# Altium PCB Keyboard_Mouse_PCB.PcbDoc
Units mil, origin at the board's own origin, x right, y up, seen from the top; angles counter-clockwise.
Board outline 5600 x 4000 mil, 4 copper layers (Top Layer, Plan(Gnd), Plane(Pwr), Bottom Layer), stack 23.756 mil thick; 132 components, 121 nets, 338 pads, 427 vias.
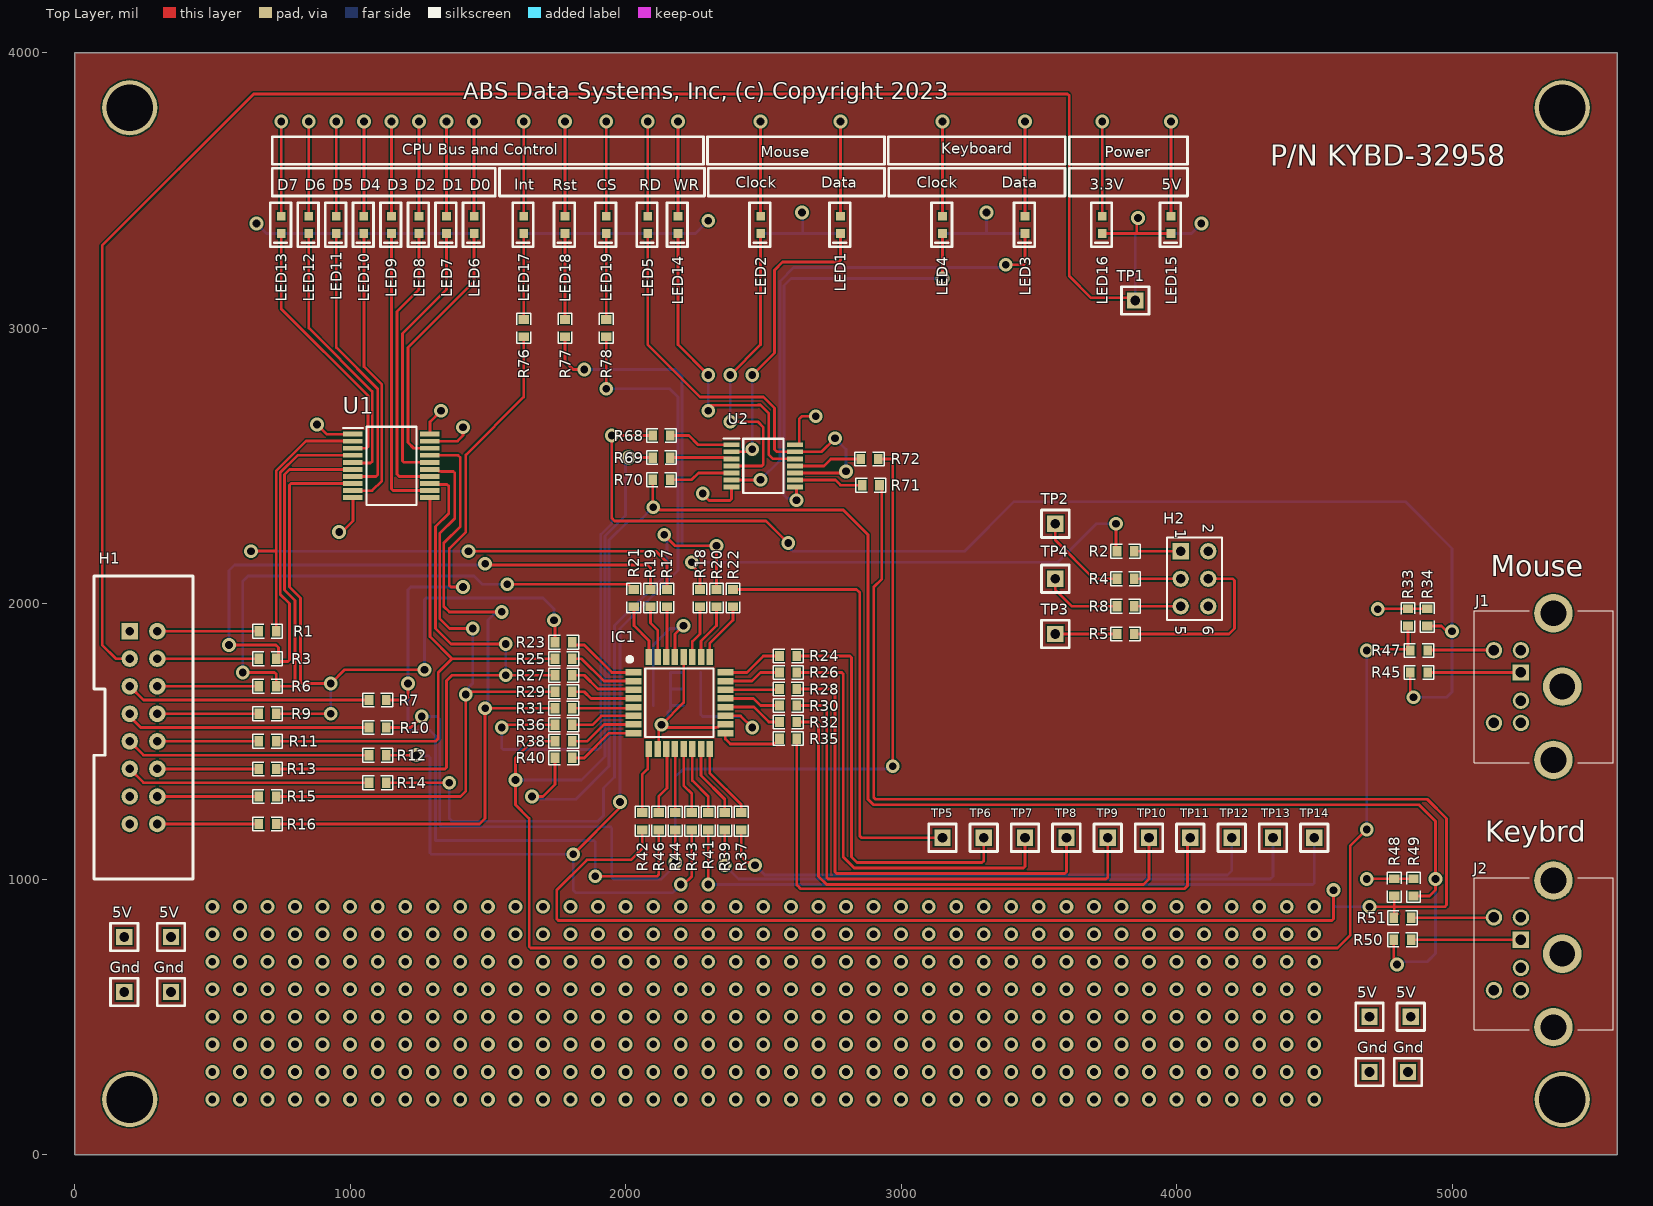
[diagram p0: Top Layer view]
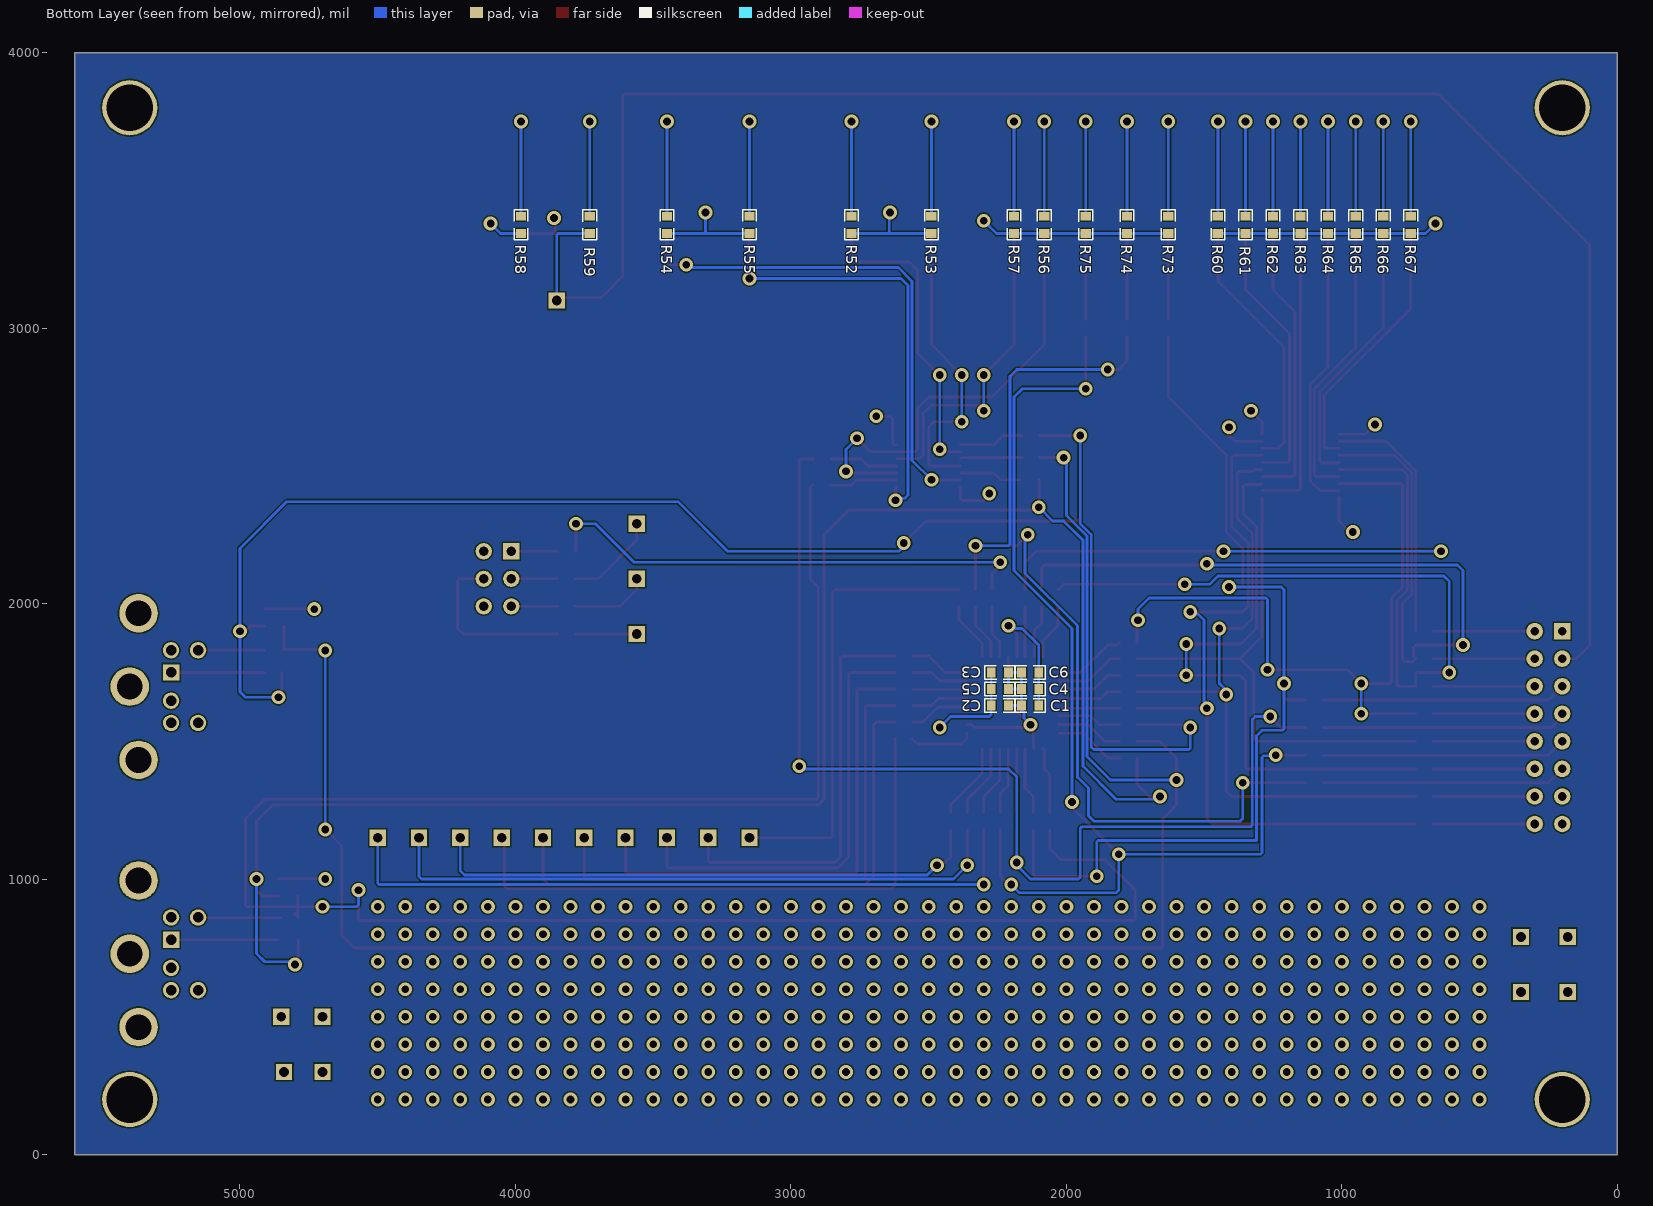
[diagram p1: Bottom Layer view, seen from below]
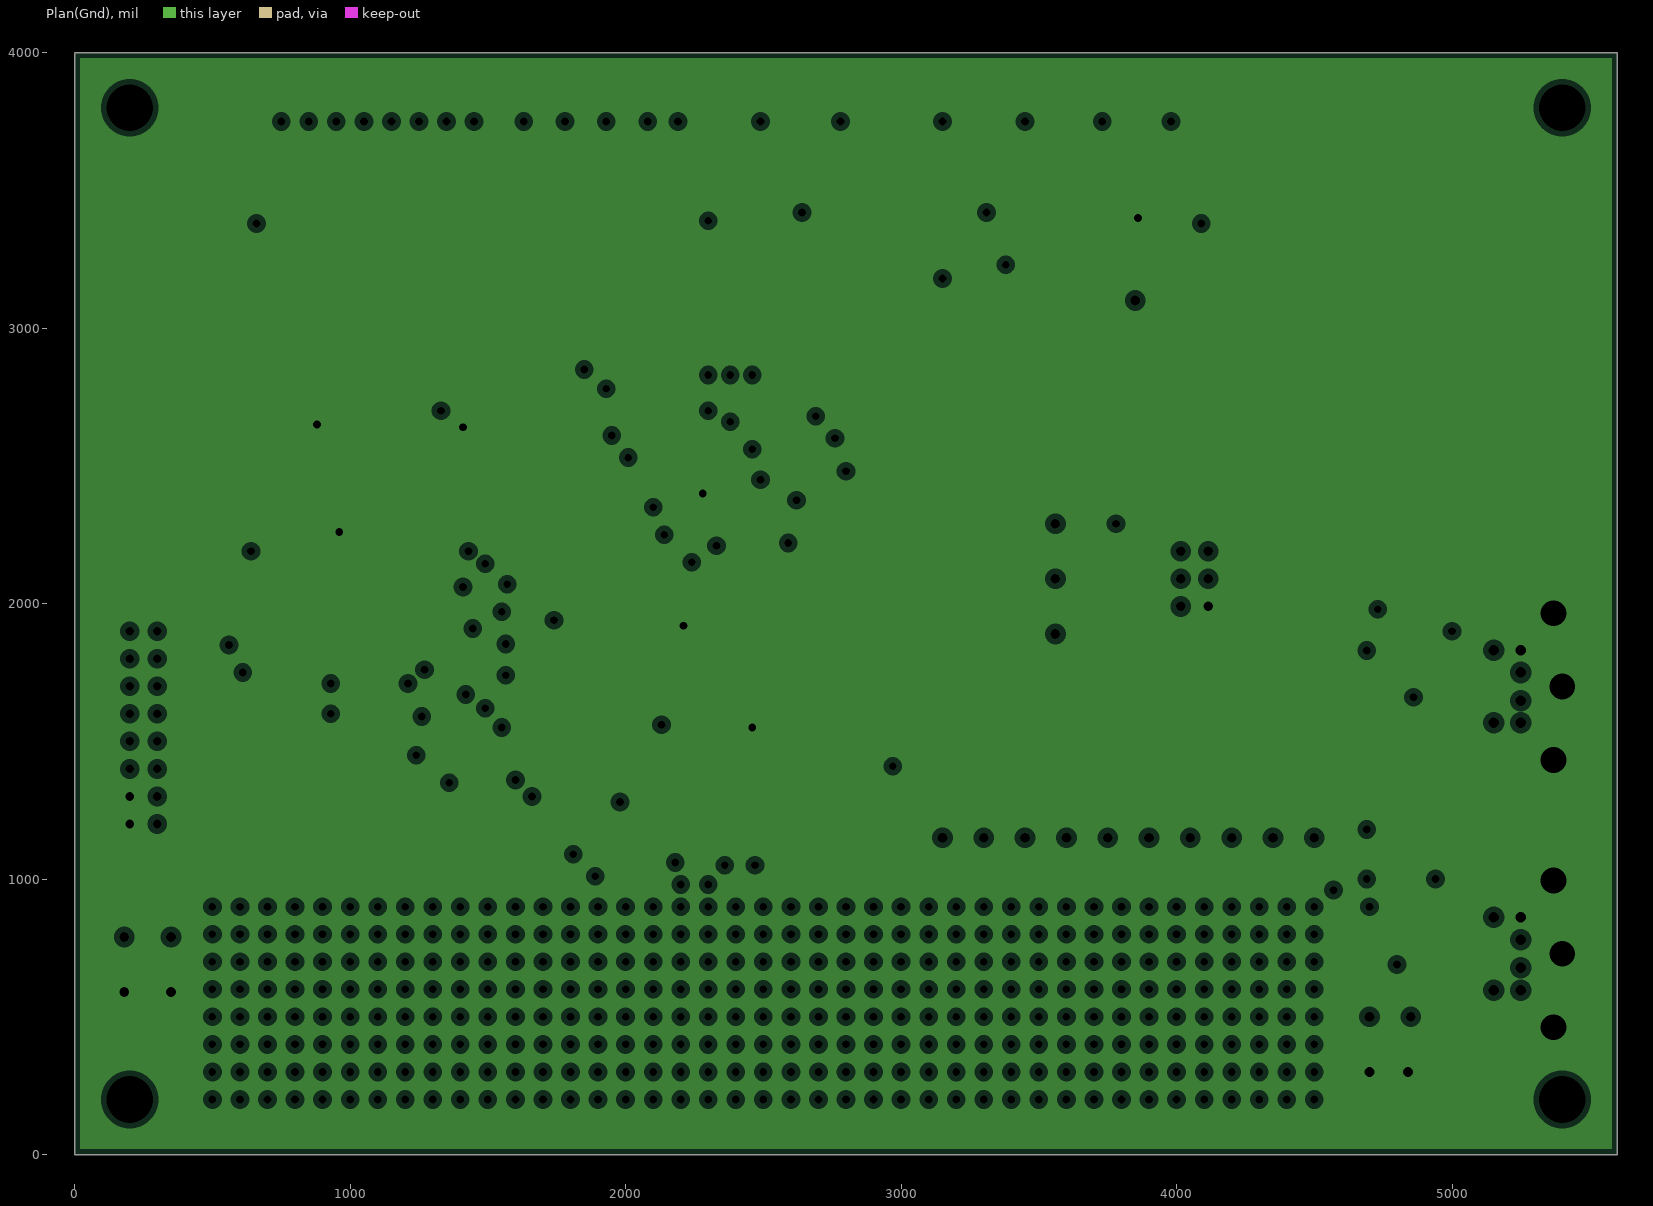
[diagram p2: Plan(Gnd), clearances drawn from the general rule]
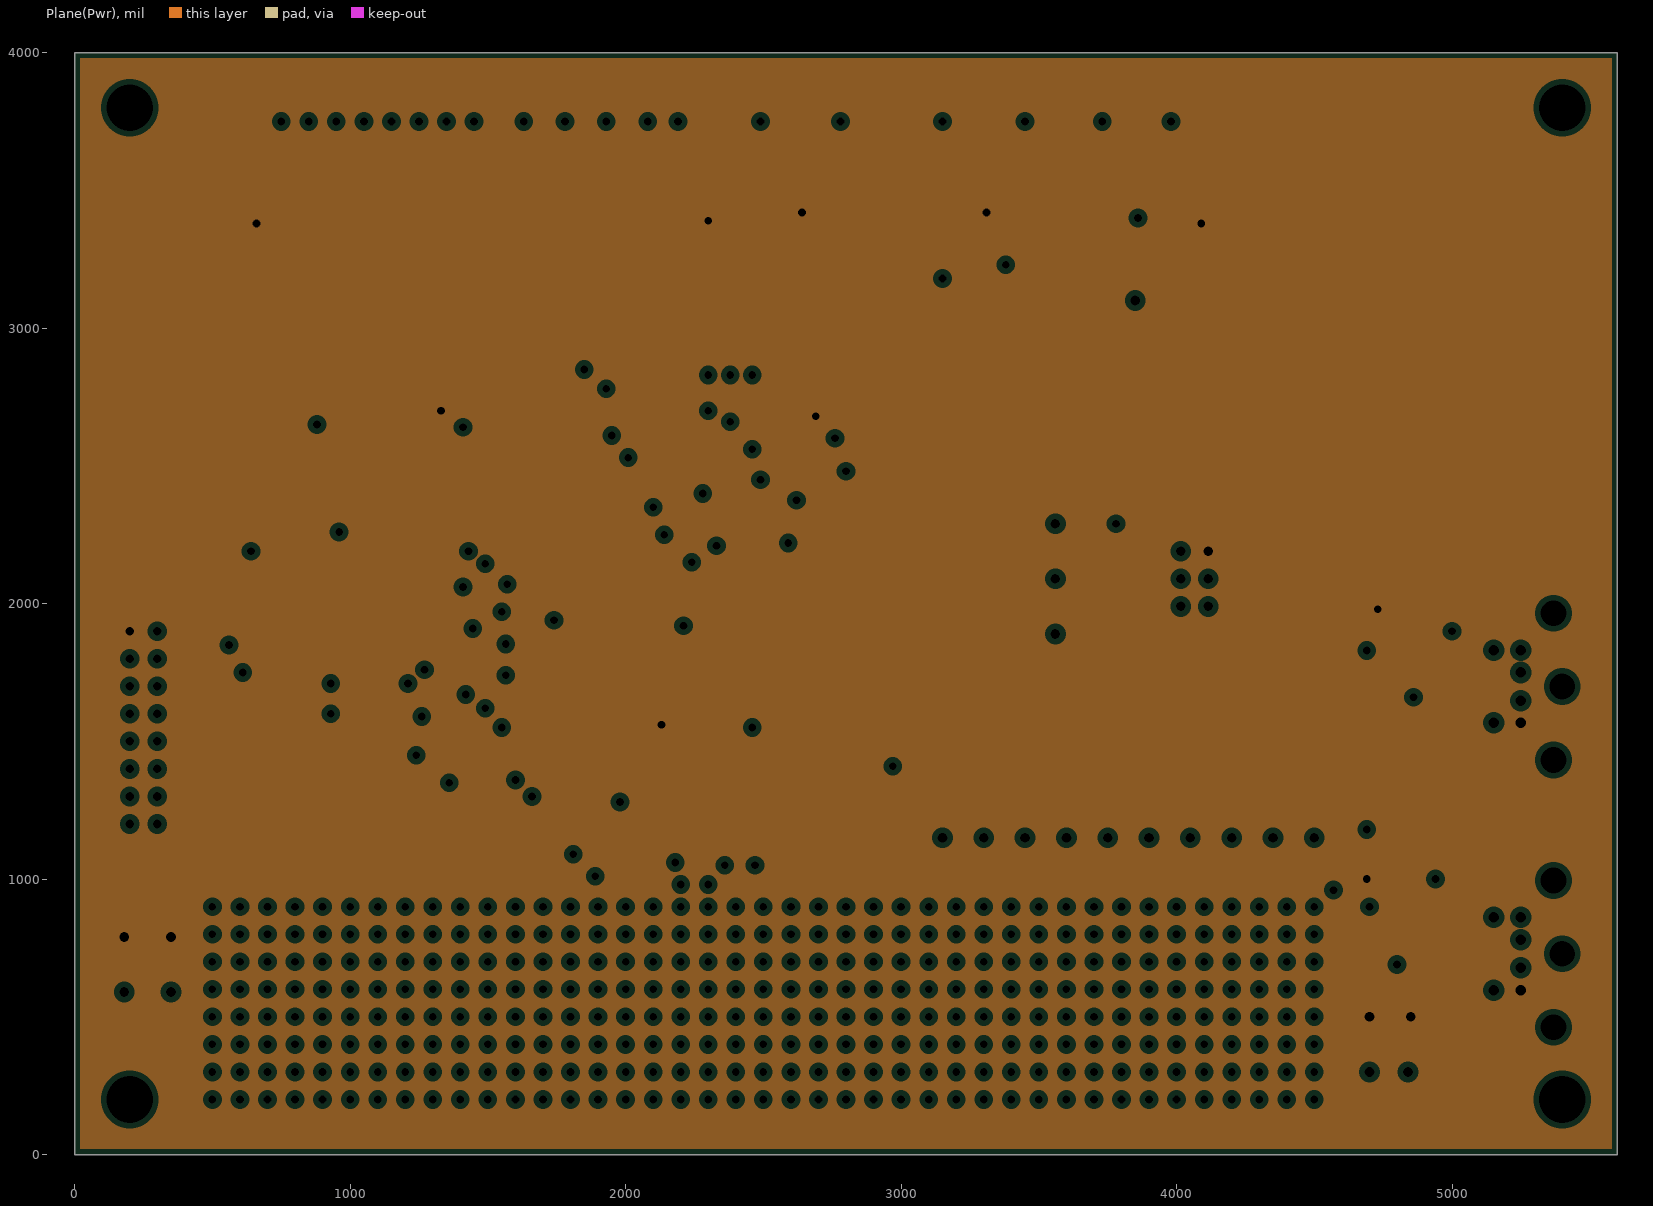
[diagram p3: Plane(Pwr), clearances drawn from the general rule]
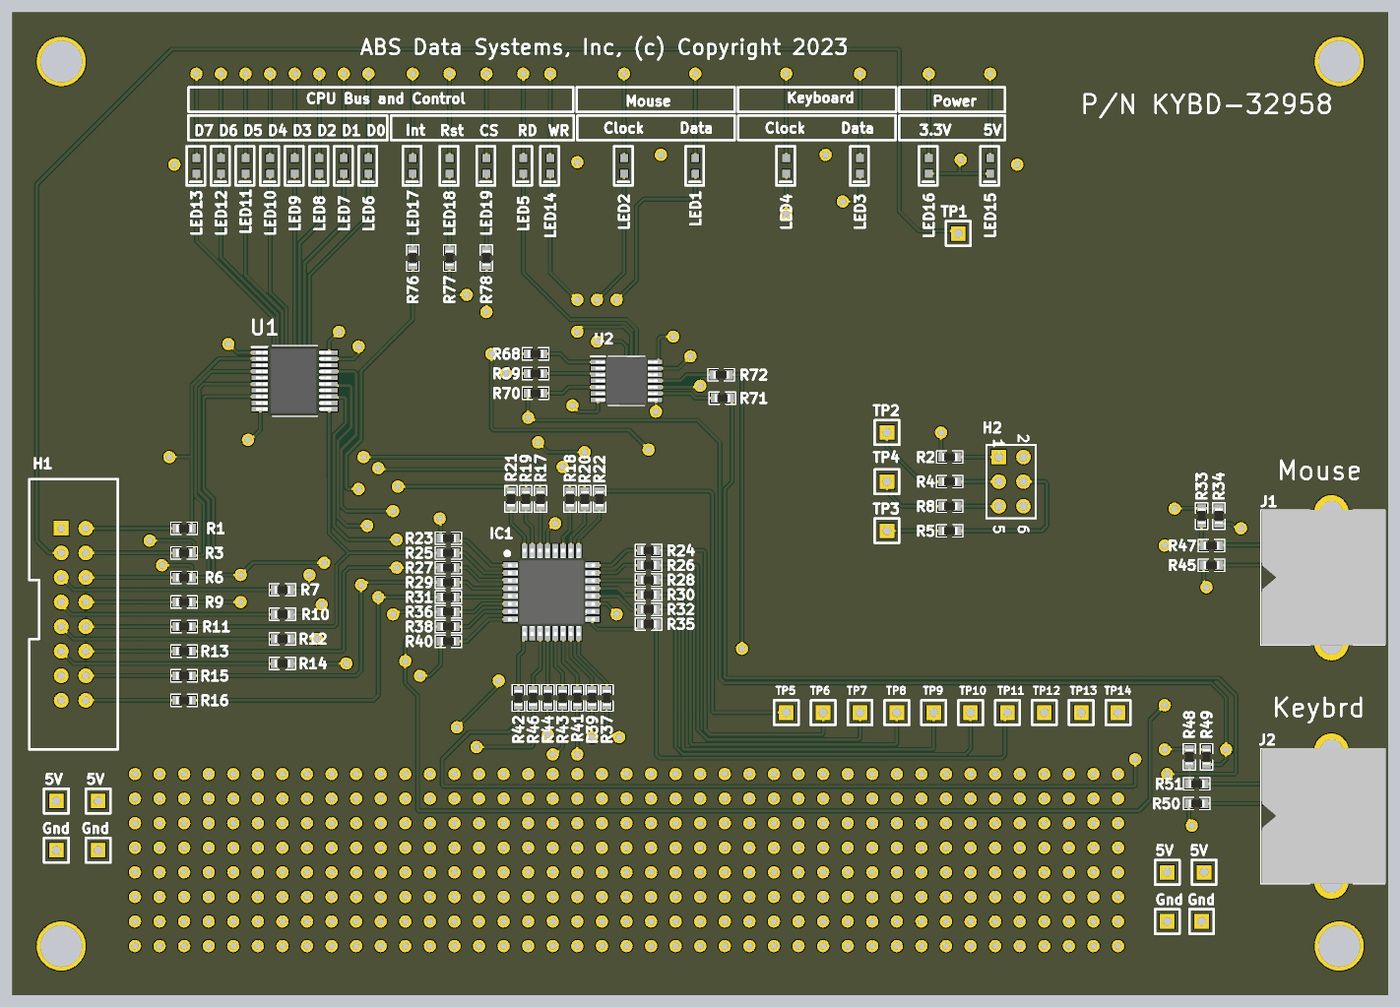
[diagram p4: 3D render of the assembled board from above, using the file's embedded part models]
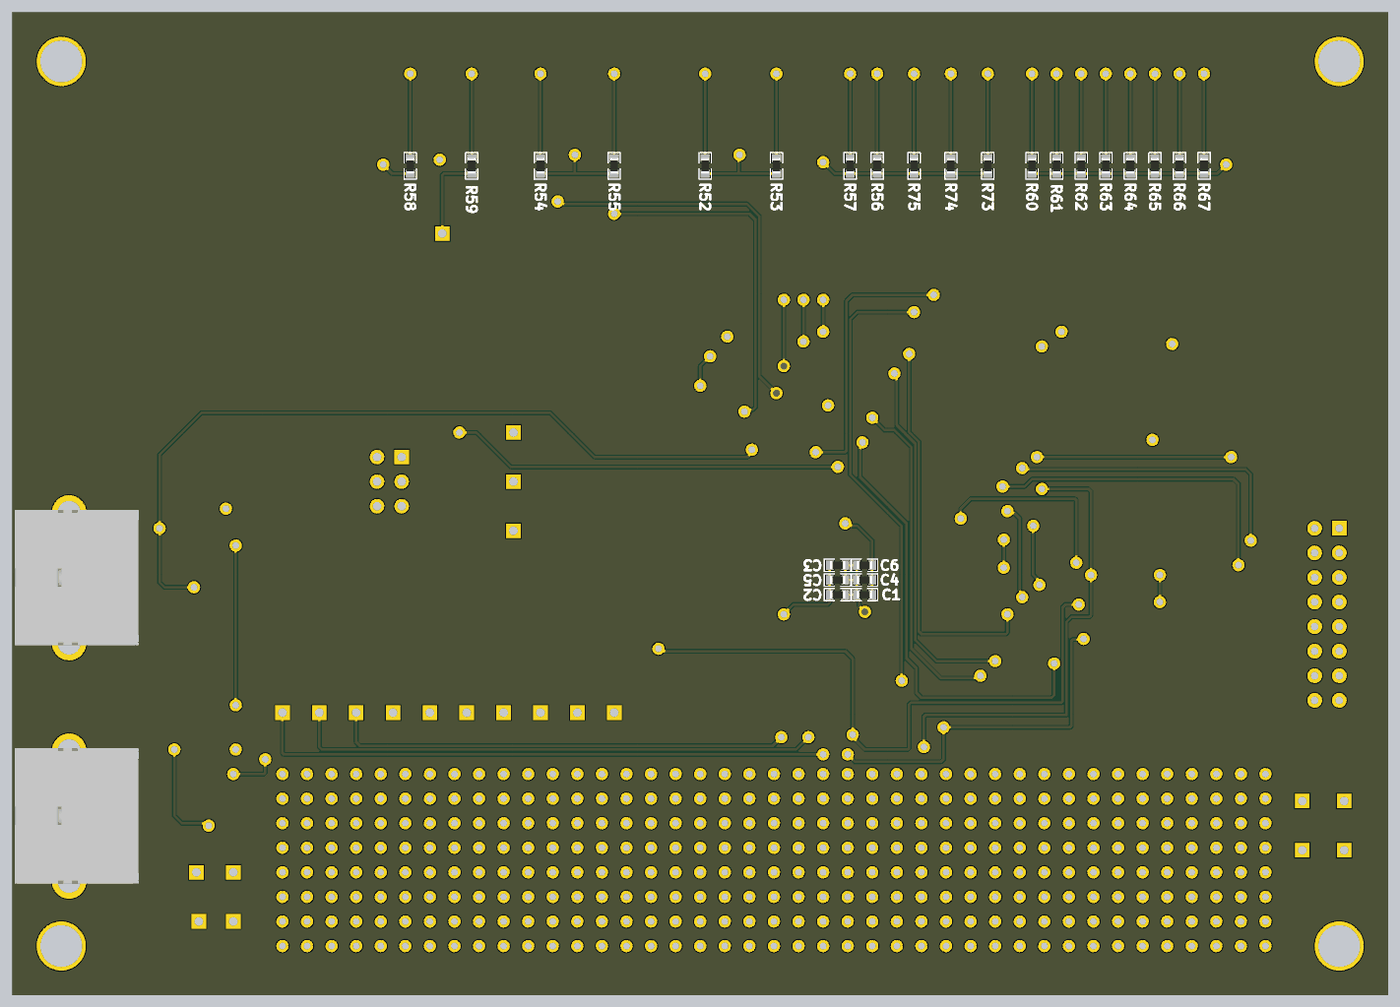
[diagram p5: 3D render of the assembled board from below, using the file's embedded part models]

## Layer stack, top to bottom
Top Solder: solder mask 0.4, Solder Resist, Dk 3.5
Top Layer: signal copper 1.4
Dielectric 2: prepreg 2.8, PP-006, Dk 4.1
Plan(Gnd): plane copper 1.378, net GND
Dielectric 1: dielectric 12.6, FR-4, Dk 4.8
Plane(Pwr): plane copper 1.378, net +5
Dielectric 3: prepreg 2.8, PP-006, Dk 4.1
Bottom Layer: signal copper 1.4
Bottom Solder: solder mask 0.4, Solder Resist, Dk 3.5

## Board outline
0,0 0,4000 5600,4000 5600,0

## Design rules (kind name [scope] priority, off if disabled: settings)
Clearance [All] p1: gap=5 ignorepadtopadclearanceinfootprint=FALSE
HoleSize [All] p1: absolutevalues=TRUE maxlimit=200 minlimit=1 maxpercent=80.000 minpercent=20.000
HoleToHoleClearance [All] p1: gap=5 allowstackedmicrovias=TRUE
MinimumSolderMaskSliver [All] p1: minsoldermaskwidth=5
PlaneClearance [All] p1: clearance=20
PlaneConnect [All] p1: planeconnectstyle=Relief reliefexpansion=20 reliefentries=4 reliefconductorwidth=10 reliefairgap=10
PolygonConnect [All] p1: connectstyle=Relief reliefconductorwidth=10 reliefentries=4 polygonreliefangle="90 Angle" airgapwidth=10
RoutingVias [All] p1: holewidth=28 width=50 viastyle="Through Hole" minholewidth=28 minwidth=50 maxholewidth=28 maxwidth=50
SilkToSilkClearance [All] p1: silktosilkclearance=4
SilkToSolderMaskClearance [IsPad] p1: minsilkscreentomaskgap=3.5 clearancetoexposedcopper=TRUE
SolderMaskExpansion [All] p1: expansion=4 istentingtop=FALSE
Width [All] p1: maxlimit=10 minlimit=5 preferedwidth=10 minimp=50.000000 maximp=50.000000 favimp=50.000000
23 further rules are at their usual default settings.

## Components (designator, comment, footprint, x,y, rotation, side; value= is the part's Value field where it differs from the comment)
5V "TP" TP 4700,500 r0 top (schematic designator TP21)
5V "TP" TP 4850,500 r0 top (schematic designator TP19)
5V "TP" TP 350,790 r0 top (schematic designator TP17)
5V "TP" TP 180,790 r0 top (schematic designator TP15)
C1 "100nf" 0603 2131.5,1630 r180 bottom
C2 "1uf" 0603 2241.5,1630 r0 bottom
C3 "100nf" 0603 2241.5,1750 r0 bottom
C4 "1uf" 0603 2131.5,1690 r180 bottom
C5 "100nf" 0603 2241.5,1690 r0 bottom
C6 "1uf" 0603 2131.5,1750 r180 bottom
Gnd "TP" TP 4700,300 r0 top (schematic designator TP22)
Gnd "TP" TP 4840,300 r0 top (schematic designator TP20)
Gnd "TP" TP 180,590 r0 top (schematic designator TP18)
Gnd "TP" TP 350,590 r0 top (schematic designator TP16)
H1 "Header_IDC_2x8" HEADER16 200,1900 r0 top locked
H2 "UDPI Programmer" HDR2X3 4015,2190 r270 top locked
IC1 "AVR64DD32-I_PT" QFP80P900X900X120-32N 2195,1640 r0 top
J1 "5749266-1" 57492661 5250,1750 r90 top locked
J2 "5749266-1" 57492661 5250,780 r90 top locked
LED1 "green" 0603_Diode 2780,3375 r90 top
LED2 "green" 0603_Diode 2490,3375 r90 top
LED3 "green" 0603_Diode 3450,3375 r90 top
LED4 "green" 0603_Diode 3150,3375 r90 top
LED5 "green" 0603_Diode 2080,3375 r90 top
LED6 "green" 0603_Diode 1450,3375 r90 top locked
LED7 "green" 0603_Diode 1350,3375 r90 top locked
LED8 "green" 0603_Diode 1250,3375 r90 top locked
LED9 "green" 0603_Diode 1150,3375 r90 top locked
LED10 "green" 0603_Diode 1050,3375 r90 top locked
LED11 "green" 0603_Diode 950,3375 r90 top locked
LED12 "green" 0603_Diode 850,3375 r90 top locked
LED13 "green" 0603_Diode 750,3375 r90 top locked
LED14 "red" 0603_Diode 2190,3375 r90 top
LED15 "red" 0603_Diode 3980,3375 r90 top
LED16 "amber" 0603_Diode 3730,3375 r90 top
LED17 "amber" 0603_Diode 1630,3375 r90 top locked
LED18 "blue" 0603_Diode 1780,3375 r90 top locked
LED19 "blue" 0603_Diode 1930,3375 r90 top locked
R1 "0R" 0603 700,1900 r180 top locked
R2 "0R" 0603 3815,2190 r0 top locked
R3 "0R" 0603 700,1800 r180 top locked
R4 "0R" 0603 3815,2090 r0 top locked
R5 "0R" 0603 3815,1890 r180 top locked
R6 "0R" 0603 700,1700 r180 top locked
R7 "0R" 0603 1100,1650 r0 top locked
R8 "0R" 0603 3815,1990 r0 top locked
R9 "0R" 0603 700,1600 r180 top locked
R10 "0R" 0603 1100,1550 r0 top locked
R11 "0R" 0603 700,1500 r180 top locked
R12 "0R" 0603 1100,1450 r0 top locked
R13 "0R" 0603 700,1400 r180 top locked
R14 "0R" 0603 1100,1350 r0 top locked
R15 "0R" 0603 700,1300 r180 top locked
R16 "0R" 0603 700,1200 r180 top locked
R17 "0R" 0603 2150,2020 r270 top
R18 "0R" 0603 2270,2020 r90 top
R19 "0R" 0603 2090,2020 r270 top
R20 "0R" 0603 2330,2020 r90 top
R21 "0R" 0603 2030,2020 r270 top
R22 "0R" 0603 2390,2020 r90 top
R23 "0R" 0603 1775,1860 r0 top
R24 "0R" 0603 2590,1810 r0 top
R25 "0R" 0603 1775,1800 r0 top
R26 "0R" 0603 2590,1750 r0 top
R27 "0R" 0603 1775,1740 r0 top
R28 "0R" 0603 2590,1690 r0 top
R29 "0R" 0603 1775,1680 r0 top
R30 "0R" 0603 2590,1630 r0 top
R31 "0R" 0603 1775,1620 r0 top
R32 "0R" 0603 2590,1570 r0 top
R33 "1k" 0603 4840,1950 r90 top locked
R34 "1k" 0603 4910,1950 r90 top locked
R35 "0R" 0603 2590,1510 r0 top
R36 "0R" 0603 1775,1560 r0 top
R37 "0R" 0603 2420,1210 r270 top
R38 "0R" 0603 1775,1500 r0 top
R39 "0R" 0603 2360,1210 r270 top
R40 "0R" 0603 1775,1440 r0 top
R41 "0R" 0603 2300,1210 r270 top
R42 "0R" 0603 2060,1210 r90 top
R43 "0R" 0603 2240,1210 r270 top
R44 "0R" 0603 2180,1210 r270 top
R45 "0R" 0603 4880,1750 r0 top
R46 "0R" 0603 2120,1210 r270 top
R47 "0R" 0603 4880,1830 r0 top
R48 "1k" 0603 4790,970 r90 top locked
R49 "1k" 0603 4860,970 r90 top locked
R50 "0R" 0603 4820,780 r0 top locked
R51 "0R" 0603 4820,860 r0 top locked
R52 "180" 0603 2780,3375 r270 bottom
R53 "180" 0603 2490,3375 r270 bottom
R54 "180" 0603 3450,3375 r270 bottom
R55 "180" 0603 3150,3375 r270 bottom
R56 "180" 0603 2080,3375 r270 bottom
R57 "180" 0603 2190,3375 r270 bottom
R58 "180" 0603 3980,3375 r270 bottom
R59 "47" 0603 3730,3375 r90 bottom
R60 "180" 0603 1450,3375 r270 bottom locked
R61 "180" 0603 1350,3375 r270 bottom locked
R62 "180" 0603 1250,3375 r270 bottom locked
R63 "180" 0603 1150,3375 r270 bottom locked
R64 "180" 0603 1050,3375 r270 bottom locked
R65 "180" 0603 950,3375 r270 bottom locked
R66 "180" 0603 850,3375 r270 bottom locked
R67 "180" 0603 750,3375 r270 bottom locked
R68 "0R" 0603 2130,2610 r0 top locked
R69 "0R" 0603 2130,2530 r0 top locked
R70 "0R" 0603 2130,2450 r0 top locked
R71 "0R" 0603 2890,2430 r180 top locked
R72 "0R" 0603 2885,2525 r180 top locked
R73 "180" 0603 1630,3375 r270 bottom
R74 "100" 0603 1780,3375 r90 bottom locked
R75 "100" 0603 1930,3375 r90 bottom locked
R76 "0R" 0603 1630,3000 r90 top locked
R77 "0R" 0603 1780,3000 r90 top locked
R78 "0R" 0603 1930,3000 r90 top locked
TP1 "TP" TP 3850,3100 r0 top
TP2 "TP" TP 3560,2290 r0 top locked
TP3 "TP" TP 3560,1890 r0 top locked
TP4 "TP" TP 3560,2090 r0 top locked
TP5 "TP" TP 3150,1150 r0 top
TP6 "TP" TP 3300,1150 r0 top
TP7 "TP" TP 3450,1150 r0 top
TP8 "TP" TP 3600,1150 r0 top
TP9 "TP" TP 3750,1150 r0 top
TP10 "TP" TP 3900,1150 r0 top
TP11 "TP" TP 4050,1150 r0 top
TP12 "TP" TP 4200,1150 r0 top
TP13 "TP" TP 4350,1150 r0 top
TP14 "TP" TP 4500,1150 r0 top
U1 "SN74ABT240ADBR" SOP65P780X200-20N 1150,2500 r0 top locked
U2 "SN74AC04PWR" SOP65P640X120-14N 2500,2500 r0 top locked

## Footprints (in the part's own frame and the unit in brackets; to place one, negate y for a bottom-side part, rotate by r counter-clockwise, add the part's x,y. Pads: shape width x height; smd on the part's side, far side on the other; paste and mask are expansions set on the pad)
0603 [mm]
  rect 0.8x0.95 smd: 1(-0.8,0) 2(0.8,0)
  silkscreen extent -1.37,-0.64 1.37,0.64, body extent -0.8,-0.4 0.8,0.4, height 0.55
0603_Diode [mm]
  rect 0.8x0.8 smd: 1(-0.8,0) 2(0.8,0)
  silkscreen extent -2.03,-0.89 2.03,1.02
57492661 [mm]
  rect 1.509x1.509 hole 0.97: 1(0,0)
  round 1.509 hole 0.97: 2(-2.6,0) 3(2.05,0) 4(-4.65,0) 5(2.05,2.49) 6(-4.65,2.49)
  round 3.555 hole 2.37: MH1(-1.3,-3.81) MH2(-8.06,-3) MH3(5.46,-3)
  silkscreen extent -8.3,-8.51 5.7,4.32, body extent -8.27,-8.64 5.73,4.19, height 6.55
HDR2X3 [mm] "Connector; Header; 3x2 Position"
  rect 1.5x1.5 hole 0.9: 1(0,0)
  round 1.5 hole 0.9: 2(0,2.54) 3(2.54,0) 4(2.54,2.54) 5(5.08,0) 6(5.08,2.54)
  silkscreen extent -1.27,-1.27 6.35,3.81
HEADER16 [mil]
  rect 60x60 hole 31.5: 1(0,0)
  round 60 hole 31.5: 2(100,0) 3(0,-100) 4(100,-100) 5(0,-200) 6(100,-200) 7(0,-300) 8(100,-300) 9(0,-400) 10(100,-400) 11(0,-500) 12(100,-500) 13(0,-600) 14(100,-600) 15(0,-700) 16(100,-700)
  silkscreen extent -130,-900 230,200
QFP80P900X900X120-32N [mm]
  rect 1.475x0.6 smd: 1(-4.238,2.8) 2(-4.238,2) 3(-4.238,1.2) 4(-4.238,0.4) 5(-4.238,-0.4) 6(-4.238,-1.2) 7(-4.238,-2) 8(-4.238,-2.8) 17(4.238,-2.8) 18(4.238,-2) 19(4.238,-1.2) 20(4.238,-0.4) 21(4.238,0.4) 22(4.238,1.2) 23(4.238,2) 24(4.238,2.8)
  rect 0.6x1.475 smd: 9(-2.8,-4.238) 10(-2,-4.238) 11(-1.2,-4.238) 12(-0.4,-4.238) 13(0.4,-4.238) 14(1.2,-4.238) 15(2,-4.238) 16(2.8,-4.238) 25(2.8,4.238) 26(2,4.238) 27(1.2,4.238) 28(0.4,4.238) 29(-0.4,4.238) 30(-1.2,4.238) 31(-2,4.238) 32(-2.8,4.238)
  silkscreen extent -4.77,-3.15 3.15,4.2, body extent -4.5,-4.5 4.5,4.5, height 1.2
SOP65P640X120-14N [mm]
  rect 1.475x0.45 smd: 1(-2.938,1.95) 2(-2.938,1.3) 3(-2.938,0.65) 4(-2.938,0) 5(-2.938,-0.65) 6(-2.938,-1.3) 7(-2.938,-1.95) 8(2.938,-1.95) 9(2.938,-1.3) 10(2.938,-0.65) 11(2.938,0) 12(2.938,0.65) 13(2.938,1.3) 14(2.938,1.95)
  silkscreen extent -3.67,-2.5 1.85,2.52, body extent -3.2,-2.5 3.2,2.5, height 1.13
SOP65P780X200-20N [mm]
  rect 1.8x0.45 smd: 1(-3.55,2.925) 2(-3.55,2.275) 3(-3.55,1.625) 4(-3.55,0.975) 5(-3.55,0.325) 6(-3.55,-0.325) 7(-3.55,-0.975) 8(-3.55,-1.625) 9(-3.55,-2.275) 10(-3.55,-2.925) 11(3.55,-2.925) 12(3.55,-2.275) 13(3.55,-1.625) 14(3.55,-0.975) 15(3.55,-0.325) 16(3.55,0.325) 17(3.55,0.975) 18(3.55,1.625) 19(3.55,2.275) 20(3.55,2.925)
  silkscreen extent -4.45,-3.6 2.3,3.6, body extent -4.03,-3.6 3.77,3.6, height 1.9
TP [mm] "Test Point"
  rect 1.5x1.5 hole 0.9: 1(0,0)
  silkscreen extent -1.27,-1.27 1.27,1.27

## Part data
5V 5V 5V 5V Gnd Gnd Gnd Gnd TP1 TP2 TP3 TP4 TP5 TP6 TP7 TP8 TP9 TP10 TP11 TP12 TP13 TP14: Color=Black, Manufacturer=Samtec, Manufacturer Part Number=TST-105-01-G-D, Max Operating Temperature=125°C, Min Operating Temperature=-55°C, Category="Headers and Wire Housings", ComponentLink1Description=https://datasheet.ciiva.com/739/tst-mkt-739845.pdf?src-supplier=Digi-Key, ComponentLink1URL=https://datasheet.ciiva.com/739/tst-mkt-739845.pdf?src-supplier=Digi-Key, ComponentLink2Description=https://datasheet.ciiva.com/10018/htst-10018510.pdf?src-supplier=Avnet, ComponentLink2URL=https://datasheet.ciiva.com/10018/htst-10018510.pdf?src-supplier=Avnet, Connector Type="Male Pin", Contact Material=Bronze, Contact Mating Length=0.25inch, Contact Plating=Gold, Depth=9.27mm, Gender=Male, Housing Color=Black, Housing Material=Polyester, Length=27.94mm, Mount="Through Hole", Number of Contacts=16, Number of Positions=16, Number of Rows=2, Orientation=Straight, Packaging=Rail/Tube, Pitch=2.54mm, Pricing 1="1=2.85000, 10=2.73600, 100=2.28000, 500=1.93800, 1000=1.65300, 5000=1.48200 (USD)", REACH SVHC="No SVHC", RoHS=Yes, Row Spacing=0.1inch, Stock 1=227, Supplier 1=Digi-Key, Termination=Solder
C1 C3 C5: library part CL10B104JB8NNNC, "Samsung Electro-Mechanics 0603 100nf"
C2 C4 C6: library part CL10B105KA8NNNL, "Samsung Electro-Mechanics 0603 1uf"
H1: "16 Pin 2x8 Through Hold IDC Connector", Color=Black, Manufacturer=Samtec, Manufacturer Part Number=TST-108-01-G-D, Max Operating Temperature=125°C, Min Operating Temperature=-55°C, Supplier Part Number 1=SAM10835-ND, Category="Headers and Wire Housings", ComponentLink1Description=https://datasheet.ciiva.com/739/tst-mkt-739845.pdf?src-supplier=Digi-Key, ComponentLink1URL=https://datasheet.ciiva.com/739/tst-mkt-739845.pdf?src-supplier=Digi-Key, ComponentLink2Description=https://datasheet.ciiva.com/10018/htst-10018510.pdf?src-supplier=Avnet, ComponentLink2URL=https://datasheet.ciiva.com/10018/htst-10018510.pdf?src-supplier=Avnet, Connector Type="Male Pin", Contact Material=Bronze, Contact Mating Length=0.25inch, Contact Plating=Gold, Depth=9.27mm, Gender=Male, Housing Color=Black, Housing Material=Polyester, Length=27.94mm, Mount="Through Hole", Number of Contacts=16, Number of Positions=16, Number of Rows=2, Orientation=Straight, Packaging=Rail/Tube, Pitch=2.54mm, Pricing 1="1=2.85000, 10=2.73600, 100=2.28000, 500=1.93800, 1000=1.65300, 5000=1.48200 (USD)", REACH SVHC="No SVHC", RoHS=Yes, Row Spacing=0.1inch, Stock 1=227, Supplier 1=Digi-Key, Termination=Solder
H2: "6 Pin 2X3 Through Hole Header"
IC1: "Integrated Circuit", Manufacturer_Name=Microchip, Manufacturer_Part_Number="AVR64DD32-I/PT | MULTI-VOLTAGE I/O", Datasheet Link=https://www.microchip.com/en-us/product/AVR64DD32, Height=1.2mm
J1 J2: "Circular DIN Connectors 6 P R/A W/O HOLDDOWN", Manufacturer_Name="TE Connectivity", Mouser Part Number=571-5749266-1, Datasheet Link=https://componentsearchengine.com/Datasheets/1/5749266-1.pdf, Geometry.Height=13mm, Manufacturer_Part_Number=5749266-1, Mouser Price/Stock=https://www.mouser.co.uk/ProductDetail/TE-Connectivity/5749266-1?qs=XlZqES4cpWaWvZ%2F3L%252BlRxA%3D%3D
LED1 LED2 LED3 LED4 LED5 LED6 LED7 LED8 LED9 LED10 LED11 LED12 LED13: library part 150060GS75000, "Wurth Elektronik 0603 green", Case Code (Imperial)=0603, Case Code (Metric)=1608, Color=Green, Forward Current=30mA, Forward Voltage=3.2V, Manufacturer="Wurth Electronics", Max Operating Temperature=85°C, Min Operating Temperature=-40°C, Package Quantity=4000, Test Current=20mA, Case/Package=0603, Category=LEDs, ComponentLink1Description=https://datasheet.ciiva.com/29562/150060gs75000-29562868.pdf?src-supplier=Digi-Key, ComponentLink1URL=https://datasheet.ciiva.com/29562/150060gs75000-29562868.pdf?src-supplier=Digi-Key, ComponentLink2Description=https://datasheet.ciiva.com/29279/759427-da-01-en-chipled-0603-w-kl-gruen-150060gs75000-29279201.pdf?src-supplier=Conrad, ComponentLink2URL=https://datasheet.ciiva.com/29279/759427-da-01-en-chipled-0603-w-kl-gruen-150060gs75000-29279201.pdf?src-supplier=Conrad, ComponentLink3Description=https://datasheet.ciiva.com/29562/150060gs75000-29562869.pdf?src-supplier=Digi-Key, ComponentLink3URL=https://datasheet.ciiva.com/29562/150060gs75000-29562869.pdf?src-supplier=Digi-Key, ComponentLink4Description=https://datasheet.ciiva.com/29562/150060gs75000-29562870.pdf?src-supplier=Digi-Key, ComponentLink4URL=https://datasheet.ciiva.com/29562/150060gs75000-29562870.pdf?src-supplier=Digi-Key, Dominant Wavelength=520nm, Height=0.7mm, Lead Free="Lead Free", Length=1.6mm, Lens Style=Clear,Rectangular, Luminous Intensity=430mcd, Manufacturer Part Number=150060GS75000, Mount="Surface Mount", Packaging="Tape and Reel", Pricing 1="1=0.14000, 50=0.13300, 100=0.11400, 500=0.09900 (USD)", REACH SVHC=Unknown, RoHS=Yes, Stock 1=71509, Supplier 1=Digi-Key, Viewing Angle=140°, Wavelength=520nm, Width=0.8mm
LED14 LED15: library part 150060RS75000, "Wurth Elektronik 0603 red", Case Code (Imperial)=0603, Case Code (Metric)=1608, Color=Green, Forward Current=30mA, Forward Voltage=3.2V, Manufacturer="Wurth Electronics", Manufacturer Part Number=150060GS75000, Max Operating Temperature=85°C, Min Operating Temperature=-40°C, Package Quantity=4000, Test Current=20mA, Case/Package=0603, Category=LEDs, ComponentLink1Description=https://datasheet.ciiva.com/29562/150060gs75000-29562868.pdf?src-supplier=Digi-Key, ComponentLink1URL=https://datasheet.ciiva.com/29562/150060gs75000-29562868.pdf?src-supplier=Digi-Key, ComponentLink2Description=https://datasheet.ciiva.com/29279/759427-da-01-en-chipled-0603-w-kl-gruen-150060gs75000-29279201.pdf?src-supplier=Conrad, ComponentLink2URL=https://datasheet.ciiva.com/29279/759427-da-01-en-chipled-0603-w-kl-gruen-150060gs75000-29279201.pdf?src-supplier=Conrad, ComponentLink3Description=https://datasheet.ciiva.com/29562/150060gs75000-29562869.pdf?src-supplier=Digi-Key, ComponentLink3URL=https://datasheet.ciiva.com/29562/150060gs75000-29562869.pdf?src-supplier=Digi-Key, ComponentLink4Description=https://datasheet.ciiva.com/29562/150060gs75000-29562870.pdf?src-supplier=Digi-Key, ComponentLink4URL=https://datasheet.ciiva.com/29562/150060gs75000-29562870.pdf?src-supplier=Digi-Key, Dominant Wavelength=520nm, Height=0.7mm, Lead Free="Lead Free", Length=1.6mm, Lens Style=Clear,Rectangular, Luminous Intensity=430mcd, Mount="Surface Mount", Packaging="Tape and Reel", Pricing 1="1=0.14000, 50=0.13300, 100=0.11400, 500=0.09900 (USD)", REACH SVHC=Unknown, RoHS=Yes, Stock 1=71509, Supplier 1=Digi-Key, Viewing Angle=140°, Wavelength=520nm, Width=0.8mm
LED16 LED17: library part 150060AS75000, "Wurth Elektronik 0603 amber", Case Code (Imperial)=0603, Case Code (Metric)=1608, Color=Green, Forward Current=30mA, Forward Voltage=3.2V, Manufacturer="Wurth Electronics", Manufacturer Part Number=150060GS75000, Max Operating Temperature=85°C, Min Operating Temperature=-40°C, Package Quantity=4000, Test Current=20mA, Case/Package=0603, Category=LEDs, ComponentLink1Description=https://datasheet.ciiva.com/29562/150060gs75000-29562868.pdf?src-supplier=Digi-Key, ComponentLink1URL=https://datasheet.ciiva.com/29562/150060gs75000-29562868.pdf?src-supplier=Digi-Key, ComponentLink2Description=https://datasheet.ciiva.com/29279/759427-da-01-en-chipled-0603-w-kl-gruen-150060gs75000-29279201.pdf?src-supplier=Conrad, ComponentLink2URL=https://datasheet.ciiva.com/29279/759427-da-01-en-chipled-0603-w-kl-gruen-150060gs75000-29279201.pdf?src-supplier=Conrad, ComponentLink3Description=https://datasheet.ciiva.com/29562/150060gs75000-29562869.pdf?src-supplier=Digi-Key, ComponentLink3URL=https://datasheet.ciiva.com/29562/150060gs75000-29562869.pdf?src-supplier=Digi-Key, ComponentLink4Description=https://datasheet.ciiva.com/29562/150060gs75000-29562870.pdf?src-supplier=Digi-Key, ComponentLink4URL=https://datasheet.ciiva.com/29562/150060gs75000-29562870.pdf?src-supplier=Digi-Key, Dominant Wavelength=520nm, Height=0.7mm, Lead Free="Lead Free", Length=1.6mm, Lens Style=Clear,Rectangular, Luminous Intensity=430mcd, Mount="Surface Mount", Packaging="Tape and Reel", Pricing 1="1=0.14000, 50=0.13300, 100=0.11400, 500=0.09900 (USD)", REACH SVHC=Unknown, RoHS=Yes, Stock 1=71509, Supplier 1=Digi-Key, Viewing Angle=140°, Wavelength=520nm, Width=0.8mm
LED18 LED19: library part 150060BS75000, "Wurth Elektronik 0603 blue", Case Code (Imperial)=0603, Case Code (Metric)=1608, Color=Green, Forward Current=30mA, Forward Voltage=3.2V, Manufacturer="Wurth Electronics", Manufacturer Part Number=150060GS75000, Max Operating Temperature=85°C, Min Operating Temperature=-40°C, Package Quantity=4000, Test Current=20mA, Case/Package=0603, Category=LEDs, ComponentLink1Description=https://datasheet.ciiva.com/29562/150060gs75000-29562868.pdf?src-supplier=Digi-Key, ComponentLink1URL=https://datasheet.ciiva.com/29562/150060gs75000-29562868.pdf?src-supplier=Digi-Key, ComponentLink2Description=https://datasheet.ciiva.com/29279/759427-da-01-en-chipled-0603-w-kl-gruen-150060gs75000-29279201.pdf?src-supplier=Conrad, ComponentLink2URL=https://datasheet.ciiva.com/29279/759427-da-01-en-chipled-0603-w-kl-gruen-150060gs75000-29279201.pdf?src-supplier=Conrad, ComponentLink3Description=https://datasheet.ciiva.com/29562/150060gs75000-29562869.pdf?src-supplier=Digi-Key, ComponentLink3URL=https://datasheet.ciiva.com/29562/150060gs75000-29562869.pdf?src-supplier=Digi-Key, ComponentLink4Description=https://datasheet.ciiva.com/29562/150060gs75000-29562870.pdf?src-supplier=Digi-Key, ComponentLink4URL=https://datasheet.ciiva.com/29562/150060gs75000-29562870.pdf?src-supplier=Digi-Key, Dominant Wavelength=520nm, Height=0.7mm, Lead Free="Lead Free", Length=1.6mm, Lens Style=Clear,Rectangular, Luminous Intensity=430mcd, Mount="Surface Mount", Packaging="Tape and Reel", Pricing 1="1=0.14000, 50=0.13300, 100=0.11400, 500=0.09900 (USD)", REACH SVHC=Unknown, RoHS=Yes, Stock 1=71509, Supplier 1=Digi-Key, Viewing Angle=140°, Wavelength=520nm, Width=0.8mm
R1 R2 R3 R4 R5 R6 R7 R8 R9 R10 R11 R12 R13 R14 R15 R16 R17 R18 R19 R20 R21 R22 R23 R24 R25 R26 R27 R28 R29 R30 R31 R32 R35 R36 R37 R38 R39 R40 R41 R42 R43 R44 R45 R46 R47 R50 R51 R68 R69 R70 R71 R72 R76 R77 R78: library part RC0603JR-070RL, "YAGEO 0603 0 ohm", Manufacturer_Name=KEMET, Mouser Part Number=603-RC0603JR-070RL, Datasheet Link=https://datasheet.datasheetarchive.com/originals/distributors/Datasheets_SAMA/902f9e387b938f871d31120f5fc1d65e.pdf, Geometry.Height=0.55mm, Manufacturer_Part_Number=RC0603JR-070RL, Mouser Price/Stock=https://www.mouser.co.uk/ProductDetail/YAGEO/RC0603JR-070RL?qs=2cAdsCoAWRGWyPcuXgGiXQ%3D%3D
R33 R34 R48 R49: library part AC0603FR-7W1KL_1, "YAGEO 0603 1k ohm", Manufacturer_Name=KEMET, Manufacturer_Part_Number=RC0603JR-070RL, Mouser Part Number=603-RC0603JR-070RL, Datasheet Link=https://datasheet.datasheetarchive.com/originals/distributors/Datasheets_SAMA/902f9e387b938f871d31120f5fc1d65e.pdf, Geometry.Height=0.55mm, Mouser Price/Stock=https://www.mouser.co.uk/ProductDetail/YAGEO/RC0603JR-070RL?qs=2cAdsCoAWRGWyPcuXgGiXQ%3D%3D
R52 R53 R54 R55 R56 R57 R58 R60 R61 R62 R63 R64 R65 R66 R67 R73: library part RC0603FR-13180RL, "YAGEO 0603 180 ohm", Manufacturer_Name=KEMET, Manufacturer_Part_Number=RC0603JR-070RL, Mouser Part Number=603-RC0603JR-070RL, Datasheet Link=https://datasheet.datasheetarchive.com/originals/distributors/Datasheets_SAMA/902f9e387b938f871d31120f5fc1d65e.pdf, Geometry.Height=0.55mm, Mouser Price/Stock=https://www.mouser.co.uk/ProductDetail/YAGEO/RC0603JR-070RL?qs=2cAdsCoAWRGWyPcuXgGiXQ%3D%3D
R59: library part RC0603FR-0747KL, "YAGEO 0603 47", Manufacturer_Name=KEMET, Manufacturer_Part_Number=RC0603JR-070RL, Mouser Part Number=603-RC0603JR-070RL, Datasheet Link=https://datasheet.datasheetarchive.com/originals/distributors/Datasheets_SAMA/902f9e387b938f871d31120f5fc1d65e.pdf, Geometry.Height=0.55mm, Mouser Price/Stock=https://www.mouser.co.uk/ProductDetail/YAGEO/RC0603JR-070RL?qs=2cAdsCoAWRGWyPcuXgGiXQ%3D%3D
R74 R75: library part RC0603FR-10100RL, "YAGEO 0603 100 ohm", Manufacturer_Name=KEMET, Manufacturer_Part_Number=RC0603JR-070RL, Mouser Part Number=603-RC0603JR-070RL, Datasheet Link=https://datasheet.datasheetarchive.com/originals/distributors/Datasheets_SAMA/902f9e387b938f871d31120f5fc1d65e.pdf, Geometry.Height=0.55mm, Mouser Price/Stock=https://www.mouser.co.uk/ProductDetail/YAGEO/RC0603JR-070RL?qs=2cAdsCoAWRGWyPcuXgGiXQ%3D%3D
U1: "Octal Buffers/Drivers With 3-State Outputs", Manufacturer_Name="Texas Instruments", Mouser Part Number=595-SN74ABT240ADBR, Datasheet Link=http://www.ti.com/lit/gpn/sn74abt240a, Geometry.Height=2mm, Manufacturer_Part_Number=SN74ABT240ADBR, Mouser Price/Stock=https://www.mouser.co.uk/ProductDetail/Texas-Instruments/SN74ABT240ADBR?qs=JHHQeKcAU3Dt82k%252BVyiYdw%3D%3D
U2: "Hex Inverters", Manufacturer_Name="Texas Instruments", Mouser Part Number=595-SN74AC04PWR, Datasheet Link=http://www.ti.com/lit/gpn/sn74ac04, Geometry.Height=1.2mm, Manufacturer_Part_Number=SN74AC04PWR, Mouser Price/Stock=https://www.mouser.co.uk/ProductDetail/Texas-Instruments/SN74AC04PWR?qs=RZS%252BpEsUn7pRvPNqsga4SA%3D%3D

## Free pads (board coordinates)
  round 200 hole 170: 37(200,200) 37(200,3800) 37(5400,200) 37(5400,3800)

## Via types
v1: diameter 50, hole 28, Top Layer to Bottom Layer, 427 vias

## Nets (pads, with @x,y where several pads share a name; then routed paths per layer and width w, separated by ;. In a path a pad name is that pad's centre, name@x,y a point inside that pad or via, vN(x,y) a via of type N, cw(c..) or ccw(c..) an arc to the next point about the centre after c; other vN are vias at no path point)
+3.3: H1.3 R59.1 TP1.1 | length 6602.4
  Top Layer w10: H1.3 150,1800 100,1850 100,3300 650,3850 3604.14,3850 3610,3844.14 3610,3190 3690,3110 3840,3110 TP1.1
  Bottom Layer w10: R59.1 3844.14,3343.5 3850,3337.65 TP1.1
+5: 5V.1 C1.1 C2.1 C3.1 C4.1 C5.1 C6.1 H1.1 H2.2 IC1.10 IC1.18 IC1.28 J1.4 J2.4 R33.2 R34.2 R48.2 R49.2 R52.2 R53.2 R54.2 R55.2 R56.2 R57.2 R58.2 R60.2 R61.2 R62.2 R63.2 R64.2 R65.2 R66.2 R67.2 R73.2 R74.1 R75.1 U1.20 U2.14 | length 3958.9
  Top Layer w10: U1.20 1289.76,2659.76 v1(1330,2700) ; IC1.10 2120,1476.89 v1@2120,1539.18 ; v1(2130,1560) 2210.75,1640.75 IC1.28 ; v1@2150.82,1550 2327.1,1550 2328.67,1551.57 2334.94,1551.57 2344.63,1561.26 IC1.18 ; U2.14 2626.14,2576.77 2630,2580.63 2630,2670 2640,2680 v1(2690,2680) ; v1(4690,1000) 4691.5,1001.5 R48.2 R49.2 ; v1(4730,1980) 4731.5,1981.5 R33.2 R34.2
  Bottom Layer w10: v1(660,3380) 696.5,3343.5 R67.2 R66.2 R65.2 R64.2 R63.2 R62.2 R61.2 R60.2 ; R73.2 R74.1 R75.1 R56.2 R57.2 2253.5,3343.5 v1(2300,3390) ; v1(2130,1560) 2130,1560.95 2153.67,1584.62 2153.67,1606.3 2157.37,1610 2162.99,1610 C1.1 ; C2.1 C1.1 ; R53.2 2646.5,3343.5 ; v1(2640,3420) 2643.28,3416.72 2643.28,3346.72 2646.5,3343.5 ; R52.2 2646.5,3343.5 ; R55.2 3310,3343.5 ; v1(3310,3420) 3310,3343.5 ; R54.2 3310,3343.5 ; R58.2 4053.5,3343.5 v1(4090,3380) ; C1.1 C4.1 ; C4.1 C5.1 C3.1 C6.1 C4.1
CPU_CS: R12.2 R43.2 R78.1 | length 4066
  Top Layer w10: R12.2 v1(1240,1450) ; v1(1810,1090) 1980,1260 v1(1980,1280) ; v1(1930,2780) R78.1 ; v1(2200,980) 2210,980 2240,1010 R43.2
  Bottom Layer w10: v1(1240,1450) 1242.43,1447.57 1284.14,1447.57 1290,1441.72 1290,1095.86 1295.86,1090 v1(1810,1090) 1810,960 1820,950 2170,950 v1(2200,980) ; v1(1930,2780) 2160,2780 2190,2750 2190,2120 1980,1910 v1(1980,1280)
CPU_D0: R1.1 R17.1 U1.2 | length 2622.2
  Top Layer w10: v1(640,2190) 640.75,2190.75 731.5,2190.75 ; R1.1 731.5,2190.75 ; U1.2 1009.8,2590 840,2590 731.5,2481.5 731.5,2190.75 ; v1(1430,2190) 2110,2190 2150,2150 R17.1
  Bottom Layer w10: v1(640,2190) v1(1430,2190)
CPU_D1: R3.1 R19.1 U1.4 | length 3161
  Top Layer w10: v1(560,1850) 730,1850 740,1840 740,1808.5 R3.1 741.5,1790 774.14,1790 780,1795.86 780,2000 746.5,2033.5 746.5,2475.28 809.6,2538.39 U1.4 ; v1(1490,2145) 1495,2140 2080,2140 2090,2130 R19.1
  Bottom Layer w10: v1(560,1850) 560,2120 580,2140 1485,2140 v1(1490,2145)
CPU_D2: R6.1 R21.1 U1.6 | length 3053.9
  Top Layer w10: v1(610,1750) 725.64,1750 731.5,1744.14 R6.1 794.14,1700 800,1705.86 800,2011.5 761.5,2050 761.5,2469.07 779.63,2487.2 U1.6 ; v1(1570,2070) 2010.44,2070 2016.3,2064.14 2016.3,2062.24 2027.05,2051.5 R21.1
  Bottom Layer w10: v1(610,1750) 610,2080 630,2100 1450,2100 1480,2070 v1(1570,2070)
CPU_D3: R9.1 R23.1 U1.8 | length 2609.7
  Top Layer w10: R9.1 v1(930,1600) ; U1.8 786.02,2436.02 780,2430 780,2060 820,2020 820,1715.86 825.86,1710 v1(930,1710) 980,1760 v1(1270,1760) ; v1(1740,1940) 1743.5,1936.5 R23.1
  Bottom Layer w10: v1(930,1600) v1(930,1710) ; v1(1270,1760) 1270,2014.14 1275.86,2020 1700,2020 1740,1980 v1(1740,1940)
CPU_D4: R11.1 R25.1 U1.11 | length 1894.9
  Top Layer w10: R11.1 1310,1500 1320,1510 1320,1750 1370,1800 ; U1.11 1289.76,2110.24 1290,2110 1290,1880 1370,1800 ; R25.1 1370,1800
CPU_D5: R13.1 R27.1 U1.13 | length 2337.1
  Top Layer w10: R13.1 1344.14,1400 1350,1405.86 1350,1720 1370,1740 v1(1565,1740) R27.1 ; U1.13 1293.62,2432.17 1351.98,2432.17 1357.83,2426.31 1357.83,2327.83 1310,2280 1310,1910 1366.21,1853.79 v1(1565,1853.79)
  Bottom Layer w10: v1(1565,1740) v1(1565,1853.79)
CPU_D6: R15.1 R29.1 U1.15 | length 2379.5
  Top Layer w10: R15.1 1400,1300 1420,1320 v1(1420,1670) 1430.82,1670 1440.82,1680 R29.1 ; U1.15 1316.34,2487.2 1323.07,2480.47 1329.34,2480.47 1329.81,2480 1374.14,2480 1380,2474.14 1380,2310 1325,2255 1325,1946.21 1361.21,1910 v1(1445,1910)
  Bottom Layer w10: v1@1427.65,1693.51 1445,1710.86 v1(1445,1910)
CPU_D7: R16.1 R31.1 U1.17 | length 2703.7
  Top Layer w10: R16.1 1470,1200 1490,1220 v1(1490,1620) R31.1 ; U1.17 1391.61,2538.39 1400,2530 1400,2280 1340,2220 1340,1990 1360,1970 v1(1550,1970)
  Bottom Layer w10: v1(1490,1620) 1497.65,1627.65 1497.65,1643.51 1500,1645.86 1500,1940 1522.35,1962.35 1542.35,1962.35 v1(1550,1970)
CPU_nInt: R7.2 R46.2 R76.1 | length 3500.2
  Top Layer w10: R7.2 1200,1650 1210,1660 v1(1210,1710) ; v1(1410,2060) 1365.86,2060 1360,2065.86 1360,2200 1420,2260 1420,2540 1630,2750 R76.1 ; v1(1890,1010) 2114.14,1010 2120,1015.86 R46.2
  Bottom Layer w10: v1(1410,2060) 1220,2060 1210,2050 v1(1210,1710) 1210,1545.86 1215.86,1540 1290,1540 1310,1520 1310,1140 1884.14,1140 1890,1134.14 v1(1890,1010)
CPU_Reset: R14.2 R20.2 R77.1 | length 3689
  Top Layer w10: R14.2 1350,1350 1350.86,1350.86 1359.14,1350.86 v1(1360,1350) ; R77.1 1780,2880 1810,2850 v1(1850,2850) ; v1(2140,2250) 2180,2210 v1(2330,2210) R20.2
  Bottom Layer w10: v1(1360,1350) 1360,1220 1370,1210 1900,1210 1920,1230 1920,1330 1960,1370 1960,1920 2150,2110 2150,2234.14 2140,2244.14 v1(2140,2250) ; v1(1850,2850) 2180,2850 2205,2825 2205,2215.86 2210.86,2210 v1(2330,2210)
CPU_RnW: R10.2 R44.2 R72.1 | length 4071.7
  Top Layer w10: R10.2 1220,1550 v1(1260,1590) ; v1(2180,1060) R44.2 ; R72.1 2964.14,2525 2970,2519.14 v1(2970,1410)
  Bottom Layer w10: v1(1260,1590) 1314.14,1590 1325,1579.14 1325,1195.86 1330.86,1190 1944.14,1190 1950,1184.14 1950,1005.86 1955.86,1000 2130,1000 2180,1050 v1(2180,1060) 2180,1370 2210,1400 2964.14,1400 2970,1405.86 v1(2970,1410)
GND: C1.2 C2.2 C3.2 C4.2 C5.2 C6.2 Gnd.1 H1.13 H1.15 H2.6 IC1.19 IC1.29 J1.3 J1.MH1 J1.MH2 J1.MH3 J2.3 J2.MH1 J2.MH2 J2.MH3 LED15.1 LED16.1 U1.1 U1.10 U1.19 U2.7 | length 1885.2
  Top Layer w10: v1(880,2650) 914.84,2615.16 U1.1 ; v1(960,2260) 970,2260 1010.24,2300.24 U1.10 ; U1.19 1389.57,2589.57 1410,2610 v1(1410,2640) ; IC1.29 2179.25,1889.25 v1(2210,1920) ; v1(2280,2400) 2280,2396.95 2302.61,2374.33 2378.47,2374.33 2384.33,2380.19 U2.7 ; IC1.19 2417.24,1592.76 v1(2460,1550) ; LED16.1 3855,3343.5 ; v1(3860,3400) 3860,3380 3855,3375 3855,3343.5 ; LED15.1 3855,3343.5
  Bottom Layer w10: C1.2 C4.2 C6.2 2100,1848.8 2161.2,1910 2184.14,1910 2186.49,1912.35 2202.35,1912.35 v1(2210,1920) ; C3.2 C5.2 C2.2 2272.99,1597.01 2280,1590 2420,1590 v1(2460,1550)
Key_Clock: R42.1 R48.1 R51.1 R71.1 | length 7617.8
  Top Layer w10: R42.1 2060,1110 2020,1070 1860,1070 1750,960 1750,855.86 1755.86,850 4564.14,850 4570,855.86 v1(4570,960) ; R71.1 2930,2421.5 2930,2090 2900.61,2060.61 2900.61,1295.86 2906.46,1290 4910,1290 4980,1220 4980,905.86 4974.14,900 4790,900 ; v1(4700,900) 4790,900 ; R48.1 4790,900 ; R51.1@4802.2,873.7 4799.25,873.7 4788.5,862.95 R51.1 4790,861.5 4790,900
  Bottom Layer w10: v1(4570,960) 4570,905.86 4575.86,900 v1(4700,900)
Key_Data: R40.1 R49.1 R50.1 R70.1 | length 6399.4
  Top Layer w10: v1(1660,1300) 1700,1300 1743.5,1343.5 R40.1 ; R70.1 2098.5,2351.5 v1(2100,2350) 2107.65,2342.35 2123.51,2342.35 2125.86,2340 2790,2340 2880,2250 2880,1290 2900,1270 4880,1270 4940,1210 v1(4940,1000) 4940,960 4918.5,938.5 R49.1 ; R50.1 4788.5,712.32 4800,700.82 v1(4800,690)
  Bottom Layer w10: v1(1660,1300) 1667.65,1292.35 1683.51,1292.35 1685.86,1290 1820,1290 1940,1410 1940,2230 2010,2300 2050,2300 v1(2100,2350) ; v1(4800,690) 4800,694.14 4805.86,700 4910,700 4940,730 v1(4940,1000)
Mouse_Clock: R33.1 R38.1 R47.1 R69.1 | length 6747
  Top Layer w10: R38.1 1660,1500 1600,1440 v1(1600,1360) 1600,1270 1650,1220 1650,755.86 1655.86,750 4584.14,750 4630,795.86 4630,1120 v1(4690,1180) ; v1(2010,2530) R69.1 ; v1(4690,1830) 4694.25,1834.25 4844.25,1834.25 4840,1838.5 R33.1
  Bottom Layer w10: v1(1600,1360) 1840,1360 1925,1445 1925,2245 2000,2320 2000,2524.14 2005.86,2530 v1(2010,2530) ; v1(4690,1180) v1(4690,1830)
Mouse_Data: R34.1 R36.1 R45.1 R68.1 | length 6345.7
  Top Layer w10: v1(1550,1550) 1560.82,1550 1570.82,1560 R36.1 ; R68.1 v1(1950,2610) 1950,2310 1960,2300 2510,2300 v1(2590,2220) ; R45.1 4848.5,1682.32 4860,1670.82 v1(4860,1660) ; R34.1 4961.5,1918.5 4980,1900 v1(5000,1900)
  Bottom Layer w10: v1(1550,1550) 1550,1475.86 1555.86,1470 1900,1470 1910,1480 1910,2251.21 1950,2291.21 v1(1950,2610) ; v1(2590,2220) 2590,2209.18 2602.43,2196.75 2602.43,2195.86 2608.28,2190 3230,2190 3410,2370 4830,2370 5000,2200 v1(5000,1900) 5000,1680 4980,1660 v1(4860,1660)
NetH1_2: H1.2 R1.2 | length 368.5
  Top Layer w10: H1.2 R1.2
NetH1_4: H1.4 R3.2 | length 368.5
  Top Layer w10: H1.4 R3.2
NetH1_5: H1.5 R7.1 | length 889.2
  Top Layer w10: H1.5 250,1650 R7.1
NetH1_6: H1.6 R6.2 | length 368.5
  Top Layer w10: H1.6 R6.2
NetH1_7: H1.7 R10.1 | length 895.1
  Top Layer w10: H1.7 200,1590 240,1550 R10.1
NetH1_8: H1.8 R9.2 | length 368.5
  Top Layer w10: H1.8 R9.2
NetH1_9: H1.9 R12.1 | length 889.2
  Top Layer w10: H1.9 250,1450 R12.1
NetH1_10: H1.10 R11.2 | length 368.5
  Top Layer w10: H1.10 R11.2
NetH1_11: H1.11 R14.1 | length 889.2
  Top Layer w10: H1.11 250,1350 R14.1
NetH1_12: H1.12 R13.2 | length 368.5
  Top Layer w10: H1.12 R13.2
NetH1_14: H1.14 R15.2 | length 368.5
  Top Layer w10: H1.14 R15.2
NetH1_16: H1.16 R16.2 | length 368.5
  Top Layer w10: H1.16 R16.2
NetH2_1: H2.1 R2.2 | length 168.5
  Top Layer w10: R2.2 H2.1
NetH2_3: H2.3 R4.2 | length 168.5
  Top Layer w10: R4.2 H2.3
NetH2_4: H2.4 R5.1 | length 643.4
  Top Layer w10: R5.1 4190,1890 4210,1910 4210,2084.14 4204.14,2090 H2.4
NetH2_5: H2.5 R8.2 | length 168.5
  Top Layer w10: R8.2 H2.5
NetIC1_1: IC1.1 R23.2 | length 267.3
  Top Layer w10: R23.2 1816.5,1850 1850,1850 1950,1750 2027.91,1750 IC1.1
NetIC1_2: IC1.2 R25.2 | length 255.3
  Top Layer w10: R25.2 1840,1800 1921.26,1718.74 IC1.2
NetIC1_3: IC1.3 R27.2 | length 243.5
  Top Layer w10: R27.2 1850,1740 1900,1690 2025.39,1690 IC1.3
NetIC1_4: IC1.4 R29.2 | length 231.7
  Top Layer w10: R29.2 1850,1680 1874.25,1655.75 IC1.4
NetIC1_5: IC1.5 R31.2 | length 223.4
  Top Layer w10: R31.2 2023.9,1620 IC1.5
NetIC1_6: IC1.6 R36.2 | length 235.2
  Top Layer w10: R36.2 1880,1560 1912.76,1592.76 IC1.6
NetIC1_7: IC1.7 R38.2 | length 247
  Top Layer w10: R38.2 1860,1500 1921.26,1561.26 IC1.7
NetIC1_8: IC1.8 R40.2 | length 258.8
  Top Layer w10: R40.2 1850,1440 1939.76,1529.76 IC1.8
NetIC1_9: IC1.9 R42.2 | length 241.9
  Top Layer w10: R42.2 2060,1380 2080,1400 2080,1468.39 IC1.9
NetIC1_11: IC1.11 R46.1 | length 245
  Top Layer w10: R46.1 2120,1300 2150,1330 2150,1470.91 IC1.11
NetIC1_12: IC1.12 R44.1 | length 232
  Top Layer w10: IC1.12 2180,1472.4 R44.1
NetIC1_13: IC1.13 R43.1 | length 243.8
  Top Layer w10: IC1.13 2210.75,1339.25 2240,1310 R43.1
NetIC1_14: IC1.14 R41.1 | length 255.6
  Top Layer w10: IC1.14 2242.24,1357.76 2300,1300 R41.1
NetIC1_15: IC1.15 R39.1 | length 267.4
  Top Layer w10: IC1.15 2273.74,1376.26 2360,1290 R39.1
NetIC1_16: IC1.16 R37.1 | length 279.2
  Top Layer w10: IC1.16 2305.24,1384.76 2420,1270 R37.1
NetIC1_17: IC1.17 R35.1 | length 235.8
  Top Layer w10: IC1.17 2361.85,1508.15 2380,1490 2538.5,1490 2544.8,1496.3 2547.76,1496.3 2558.5,1507.05 R35.1
NetIC1_20: IC1.20 R32.1 | length 219.1
  Top Layer w10: IC1.20 2465.75,1624.25 2520,1570 R32.1
NetIC1_21: IC1.21 R30.1 | length 207.3
  Top Layer w10: IC1.21 2464.25,1655.75 2490,1630 R30.1
NetIC1_22: IC1.22 R28.1 | length 197.8
  Top Layer w10: IC1.22 2555.75,1687.24 R28.1
NetIC1_23: IC1.23 R26.1 | length 209.6
  Top Layer w10: IC1.23 2458.74,1718.74 2490,1750 R26.1
NetIC1_24: IC1.24 R24.1 | length 221.4
  Top Layer w10: IC1.24 2440.24,1750.24 2500,1810 R24.1
NetIC1_25: IC1.25 R22.1 | length 216.8
  Top Layer w10: IC1.25 2305.24,1855.24 2390,1940 R22.1
NetIC1_26: IC1.26 R20.1 | length 205
  Top Layer w10: IC1.26 2273.74,1863.74 2330,1920 R20.1
NetIC1_27: IC1.27 R18.1 | length 193.2
  Top Layer w10: IC1.27 2242.24,1862.24 2270,1890 R18.1
NetIC1_30: IC1.30 R17.2 | length 182.6
  Top Layer w10: IC1.30 2150,1809.09 R17.2
NetIC1_31: IC1.31 R19.2 | length 192.5
  Top Layer w10: R19.2 2090,1930 2116.26,1903.74 IC1.31
NetIC1_32: IC1.32 R21.2 | length 204.3
  Top Layer w10: R21.2 2030,1920 2084.76,1865.24 IC1.32
NetJ1_1: J1.1 R45.2 | length 339
  Top Layer w10: R45.2 5248.82,1750 J1.1@5250,1751.18
NetJ1_5: J1.5 R47.2 | length 241.3
  Top Layer w10: R47.2 4913.39,1831.89 J1.5@5151.97,1831.89
NetJ2_1: J2.1 R50.2 | length 388.5
  Top Layer w10: R50.2@4861.5,780 J2.1
NetJ2_5: J2.5 R51.2 | length 300.8
  Top Layer w10: R51.2 5151.26,860 J2.5
NetLED1_1: LED1.1 U2.2 | length 1115.7
  Top Layer w10: U2.2 2451.18,2551.18 v1(2460,2560) ; v1(2460,2830) 2540,2910 2540,3210 2570,3240 2774.14,3240 2780,3245.86 LED1.1
  Bottom Layer w10: v1(2460,2560) 2460,2820 2460.86,2820.86 2460.86,2829.14 v1(2460,2830)
NetLED1_2: LED1.2 R52.1 | length 687
  Top Layer w10: LED1.2 v1(2780,3750)
  Bottom Layer w10: R52.1 v1(2780,3750)
NetLED2_1: LED2.1 U2.4 | length 1109.6
  Top Layer w10: v1(2380,2660) 2480,2660 2500,2640 2500,2505.86 2494.14,2500 U2.4 ; v1(2380,2830) 2490,2940 LED2.1
  Bottom Layer w10: v1(2380,2660) v1(2380,2830)
NetLED2_2: LED2.2 R53.1 | length 705.3
  Top Layer w10: LED2.2 v1(2490,3750) v1@2500,3760
  Bottom Layer w10: R53.1 2490,3729.18 2500,3739.18 v1@2500,3750
NetLED3_1: LED3.1 U2.6 | length 1880.1
  Top Layer w10: U2.6 2488.82,2448.82 v1(2490,2450) ; v1(3380,3230) 3444.14,3230 3450,3235.86 LED3.1
  Bottom Layer w10: v1(2490,2450) 2560,2520 2560,3170 2610,3220 3370,3220 v1(3380,3230)
NetLED3_2: LED3.2 R54.1 | length 687
  Top Layer w10: LED3.2 v1(3450,3750)
  Bottom Layer w10: R54.1 v1(3450,3750)
NetLED4_1: LED4.1 U2.8 | length 1613.2
  Top Layer w10: U2.8 2616.14,2423.23 2620,2419.37 v1(2620,2375) ; v1(3150,3180) LED4.1
  Bottom Layer w10: v1(2620,2375) 2612.35,2382.65 2585.99,2382.65 2575,2393.64 2575,3155 2600,3180 v1(3150,3180)
NetLED4_2: LED4.2 R55.1 | length 687
  Top Layer w10: LED4.2 v1(3150,3750)
  Bottom Layer w10: R55.1 v1(3150,3750)
NetLED5_2: LED5.2 R56.1 | length 687
  Top Layer w10: LED5.2 v1(2080,3750)
  Bottom Layer w10: R56.1 v1(2080,3750)
NetLED6_1: LED6.1 U1.18 | length 946.4
  Top Layer w10: U1.18 1231.02,2563.98 1210,2585 1210,2930 1450,3170 LED6.1
NetLED6_2: LED6.2 R60.1 | length 687
  Top Layer w10: LED6.2 v1(1450,3750)
  Bottom Layer w10: R60.1 v1(1450,3750)
NetLED7_1: LED7.1 U1.16 | length 993.3
  Top Layer w10: U1.16 1195.86,2512.8 1190,2518.65 1190,2980 1350,3140 LED7.1
NetLED7_2: LED7.2 R61.1 | length 687
  Top Layer w10: LED7.2 v1(1350,3750)
  Bottom Layer w10: R61.1 v1(1350,3750)
NetLED8_1: LED8.1 U1.14 | length 1029.9
  Top Layer w10: LED8.1 1250,3140 1170,3060 1170,2470 1178.39,2461.61 U1.14
NetLED8_2: LED8.2 R62.1 | length 687
  Top Layer w10: LED8.2 v1(1250,3750)
  Bottom Layer w10: R62.1 v1(1250,3750)
NetLED9_1: LED9.1 U1.12 | length 1069.4
  Top Layer w10: LED9.1 1150,2416.29 1155.86,2410.43 U1.12
NetLED9_2: LED9.2 R63.1 | length 687
  Top Layer w10: LED9.2 v1(1150,3750)
  Bottom Layer w10: R63.1 v1(1150,3750)
NetLED10_1: LED10.1 U1.9 | length 1044.9
  Top Layer w10: U1.9 1010.67,2410 1080,2410 1115,2445 1115,2795 1050,2860 LED10.1
NetLED10_2: LED10.2 R64.1 | length 687
  Top Layer w10: LED10.2 v1(1050,3750)
  Bottom Layer w10: R64.1 v1(1050,3750)
NetLED11_1: LED11.1 U1.7 | length 1030.4
  Top Layer w10: LED11.1 950,2930 1100,2780 1100,2467.47 1094.14,2461.61 U1.7
NetLED11_2: LED11.2 R65.1 | length 687
  Top Layer w10: LED11.2 v1(950,3750)
  Bottom Layer w10: R65.1 v1(950,3750)
NetLED12_1: LED12.1 U1.5 | length 996.3
  Top Layer w10: LED12.1 850,3000 1080,2770 1080,2515.86 1074.14,2510 1013.03,2510 U1.5
NetLED12_2: LED12.2 R66.1 | length 687
  Top Layer w10: LED12.2 v1(850,3750)
  Bottom Layer w10: R66.1 v1(850,3750)
NetLED13_1: LED13.1 U1.3 | length 961.3
  Top Layer w10: LED13.1 750,3070 1065,2755 1065,2569.83 1059.14,2563.98 U1.3
NetLED13_2: LED13.2 R67.1 | length 707
  Top Layer w10: LED13.2 v1@750,3760
  Bottom Layer w10: R67.1 v1@750,3760
  other v1: 750,3750
NetLED14_1: LED14.1 U2.12 | length 1190.4
  Top Layer w10: LED14.1 2190,2940 v1(2300,2830) ; v1(2300,2700) 2300,2714.14 2305.86,2720 2480,2720 2480.86,2720.86 2489.14,2720.86 2520,2690 2520,2540 2534.41,2525.59 U2.12
  Bottom Layer w10: v1(2300,2700) v1(2300,2830)
NetLED14_2: LED14.2 R57.1 | length 687
  Top Layer w10: LED14.2 v1(2190,3750)
  Bottom Layer w10: R57.1 v1(2190,3750)
NetLED15_2: LED15.2 R58.1 | length 687
  Top Layer w10: LED15.2 v1(3980,3750)
  Bottom Layer w10: R58.1 v1(3980,3750)
NetLED16_2: LED16.2 R59.2 | length 687
  Top Layer w10: LED16.2 v1(3730,3750)
  Bottom Layer w10: R59.2 v1(3730,3750)
NetLED17_1: LED17.1 R76.2 | length 312
  Top Layer w10: R76.2 LED17.1
NetLED17_2: LED17.2 R73.1 | length 687
  Top Layer w10: LED17.2 v1(1630,3750)
  Bottom Layer w10: R73.1 v1(1630,3750)
NetLED18_1: LED18.1 R77.2 | length 312
  Top Layer w10: R77.2 LED18.1
NetLED18_2: LED18.2 R74.2 | length 687
  Top Layer w10: LED18.2 v1(1780,3750)
  Bottom Layer w10: R74.2 v1(1780,3750)
NetLED19_1: LED19.1 R78.2 | length 312
  Top Layer w10: R78.2 LED19.1
NetLED19_2: LED19.2 R75.2 | length 687
  Top Layer w10: LED19.2 v1(1930,3750)
  Bottom Layer w10: R75.2 v1(1930,3750)
NetR4_1: R4.1 TP2.1 | length 341.5
  Top Layer w10: TP2.1 3560,2230 3700,2090 R4.1
NetR5_2: R5.2 TP3.1 | length 223.5
  Top Layer w10: TP3.1 R5.2
NetR8_1: R8.1 TP4.1 | length 288.4
  Top Layer w10: TP4.1 3560,2050 3620,1990 R8.1
NetR22_2: R22.2 TP5.1 | length 1651.3
  Top Layer w10: R22.2 2838.5,2051.5 2850,2040 2850,1155.86 2855.86,1150 TP5.1
NetR24_2: R24.2 TP6.1 | length 1499.9
  Top Layer w10: R24.2 2814.14,1810 2820,1804.14 2820,1080 2840,1060 3294.14,1060 3300,1065.86 TP6.1
NetR26_2: R26.2 TP7.1 | length 1618.2
  Top Layer w10: R26.2 2784.14,1750 2790,1744.14 2790,1080 2830,1040 3444.14,1040 3450,1045.86 TP7.1
NetR28_2: R28.2 TP8.1 | length 1768.2
  Top Layer w10: R28.2 2754.14,1690 2760,1684.14 2760,1025.86 2765.86,1020 3594.14,1020 3600,1025.86 TP8.1
NetR30_2: R30.2 TP9.1 | length 1898.2
  Top Layer w10: R30.2 2724.14,1630 2730,1624.14 2730,1005.86 2735.86,1000 3744.14,1000 3750,1005.86 TP9.1
NetR32_2: R32.2 TP10.1 | length 2003.4
  Top Layer w10: R32.2 2690,1570 2700,1560 2700,1010 2730,980 3880,980 3900,1000 TP10.1
NetR35_2: R35.2 TP11.1 | length 2138.4
  Top Layer w10: R35.2 2621.5,978.5 2635,965 4029.14,965 4040,975.86 4040,1140 TP11.1
NetR37_2: R37.2 TP12.1 | length 2031.6
  Top Layer w10: R37.2 2420,1080 2440,1060 2460,1060 v1(2470,1050)
  Bottom Layer w10: v1(2470,1050) 2505,1015 4185,1015 4200,1030 TP12.1
NetR39_2: R39.2 TP13.1 | length 2285.8
  Top Layer w10: v1(2360,1050) R39.2
  Bottom Layer w10: v1(2360,1050) 2364.14,1050 2370,1044.14 2370,1040 2410,1000 4340,1000 4350,1010 TP13.1
NetR41_2: R41.2 TP14.1 | length 2565.1
  Top Layer w10: v1(2300,980) R41.2
  Bottom Layer w10: v1(2300,980) 4494.14,980 4500,985.86 TP14.1
NetR68_2: R68.2 U2.1 | length 236.6
  Top Layer w10: R68.2 2230,2610 2263.23,2576.77 U2.1
NetR69_2: R69.2 U2.3 | length 224.7
  Top Layer w10: R69.2 2354.44,2530 2354.99,2529.45 2380.47,2529.45 U2.3
NetR70_2: R70.2 U2.5 | length 224.9
  Top Layer w10: R70.2@2169.59,2450 2240,2450 2264.41,2474.41 U2.5
NetR71_2: R71.2 U2.9 | length 250.6
  Top Layer w10: U2.9 2761.18,2448.82 2780,2430 R71.2
NetR72_2: R72.2 U2.11 | length 248.2
  Top Layer w10: U2.11 2720,2500 2745,2525 R72.2
Read_Inverted: LED5.1 U2.10 U2.13 | length 1675.9
  Top Layer w10: LED5.1 2080,2940 2270,2750 2500,2750 2540,2710 2540,2560 2548.82,2551.18 U2.13 2711.18,2551.18 v1(2760,2600) ; U2.10 2794.41,2474.41 v1(2800,2480)
  Bottom Layer w10: v1(2760,2600) 2800,2560 v1(2800,2480)
UPDI: R2.1 R18.2 | length 1810.4
  Top Layer w10: v1(2240,2150) 2240,2140 2270,2110 R18.2 ; v1(3780,2290) 3780,2193.5 R2.1
  Bottom Layer w10: v1(2240,2150) 3570,2150 3710,2290 v1(3780,2290)
pads on no net: J1.2 J1.6 J2.2 J2.6
copper on no net:
  other v1: 500,200 600,200 700,200 800,200 900,200 1000,200 1100,200 1200,200 1300,200 1400,200 1500,200 1600,200 1700,200 1800,200 1900,200 2000,200 2100,200 2200,200 2300,200 2400,200 2500,200 2600,200 2700,200 2800,200 2900,200 3000,200 3100,200 3200,200 3300,200 3400,200 3500,200 3600,200 3700,200 3800,200 3900,200 4000,200 4100,200 4200,200 4300,200 4400,200 4500,200 500,300 600,300 700,300 800,300 900,300 1000,300 1100,300 1200,300 1300,300 1400,300 1500,300 1600,300 1700,300 1800,300 1900,300 2000,300 2100,300 2200,300 2300,300 2400,300 2500,300 2600,300 2700,300 2800,300 2900,300 3000,300 3100,300 3200,300 3300,300 3400,300 3500,300 3600,300 3700,300 3800,300 3900,300 4000,300 4100,300 4200,300 4300,300 4400,300 4500,300 500,400 600,400 700,400 800,400 900,400 1000,400 1100,400 1200,400 1300,400 1400,400 1500,400 1600,400 1700,400 1800,400 1900,400 2000,400 2100,400 2200,400 2300,400 2400,400 2500,400 2600,400 2700,400 2800,400 2900,400 3000,400 3100,400 3200,400 3300,400 3400,400 3500,400 3600,400 3700,400 3800,400 3900,400 4000,400 4100,400 4200,400 4300,400 4400,400 4500,400 500,500 600,500 700,500 800,500 900,500 1000,500 1100,500 1200,500 1300,500 1400,500 1500,500 1600,500 1700,500 1800,500 1900,500 2000,500 2100,500 2200,500 2300,500 2400,500 2500,500 2600,500 2700,500 2800,500 2900,500 3000,500 3100,500 3200,500 3300,500 3400,500 3500,500 3600,500 3700,500 3800,500 3900,500 4000,500 4100,500 4200,500 4300,500 4400,500 4500,500 500,600 600,600 700,600 800,600 900,600 1000,600 1100,600 1200,600 1300,600 1400,600 1500,600 1600,600 1700,600 1800,600 1900,600 2000,600 2100,600 2200,600 2300,600 2400,600 2500,600 2600,600 2700,600 2800,600 2900,600 3000,600 3100,600 3200,600 3300,600 3400,600 3500,600 3600,600 3700,600 3800,600 3900,600 4000,600 4100,600 4200,600 4300,600 4400,600 4500,600 500,700 600,700 700,700 800,700 900,700 1000,700 1100,700 1200,700 1300,700 1400,700 1500,700 1600,700 1700,700 1800,700 1900,700 2000,700 2100,700 2200,700 2300,700 2400,700 2500,700 2600,700 2700,700 2800,700 2900,700 3000,700 3100,700 3200,700 3300,700 3400,700 3500,700 3600,700 3700,700 3800,700 3900,700 4000,700 4100,700 4200,700 4300,700 4400,700 4500,700 500,800 600,800 700,800 800,800 900,800 1000,800 1100,800 1200,800 1300,800 1400,800 1500,800 1600,800 1700,800 1800,800 1900,800 2000,800 2100,800 2200,800 2300,800 2400,800 2500,800 2600,800 2700,800 2800,800 2900,800 3000,800 3100,800 3200,800 3300,800 3400,800 3500,800 3600,800 3700,800 3800,800 3900,800 4000,800 4100,800 4200,800 4300,800 4400,800 4500,800 500,900 600,900 700,900 800,900 900,900 1000,900 1100,900 1200,900 1300,900 1400,900 1500,900 1600,900 1700,900 1800,900 1900,900 2000,900 2100,900 2200,900 2300,900 2400,900 2500,900 2600,900 2700,900 2800,900 2900,900 3000,900 3100,900 3200,900 3300,900 3400,900 3500,900 3600,900 3700,900 3800,900 3900,900 4000,900 4100,900 4200,900 4300,900 4400,900 4500,900

## Polygon pours and split planes (outlines as drawn)
no net on Bottom Layer "NONET_L04_P001" (solid, pour order 1): 5600,0 5600,4000 0,4000 0,0
no net on Top Layer "NONET_L01_P000" (solid, pour order 0): 0,4000 5600,4000 5600,0 0,0
+5 on Plane(Pwr) (split plane): 5579.9,20.1 20.1,20.1 20.1,3979.9 5579.9,3979.9
GND on Plan(Gnd) (split plane): 5579.9,20.1 20.1,20.1 20.1,3979.9 5579.9,3979.9

## Silkscreen, mask and mechanical layers (free items; w line width, h text height)
Top Overlay:
  lines w10: 717,3480 1527,3480 1527,3580 717,3580 717,3480 ; 717.5,3595 2282.5,3595 2282.5,3695 717.5,3695 717.5,3595 ; 1542,3480 2286,3480 2286,3580 1542,3580 1542,3480 ; 2297.5,3595 2940,3595 2940,3695 2297.5,3695 2297.5,3595 ; 2300,3480 2940,3480 2940,3580 2300,3580 2300,3480 ; 2953.75,3595 3596.25,3595 3596.25,3695 2953.75,3695 2953.75,3595 ; 2955,3480 3595,3480 3595,3580 2955,3580 2955,3480 ; 3610,3480 4040,3480 4040,3580 3610,3580 3610,3480 ; 3610,3595 4040,3595 4040,3695 3610,3695 3610,3595
  text "ABS Data Systems, Inc, (c) Copyright 2023" at 1410,3829.99 h60
  text "Keyboard" at 3146.27,3633.33 h40
  text "CPU Bus and Control" at 1190,3630 h40
  text "Mouse" at 2490,3620 h40
  text "Power" at 3740,3620 h40
  text "P/N KYBD-32958" at 4340,3590 h75
  text "Clock" at 2400,3510 h40
  text "Data" at 2710,3510 h40
  text "Clock" at 3056.27,3510 h40
  text "Data" at 3366.27,3510 h40
  text "Int" at 1595,3501.5 h40
  text "3.3V" at 3685,3501.5 h40
  text "5V" at 3945.78,3501.5 h40
  text "D7" at 735,3500 h40
  text "D6" at 835,3500 h40
  text "D5" at 935,3500 h40
  text "D4" at 1035,3500 h40
  text "D3" at 1135,3500 h40
  text "D2" at 1235,3500 h40
  text "D1" at 1335,3500 h40
  text "D0" at 1435,3500 h40
  text "Rst" at 1735,3500 h40
  text "CS" at 1895,3500 h40
  text "RD" at 2050,3500 h40
  text "WR" at 2175,3500 h40
  text "Mouse" at 5140,2100 h75
  text "Keybrd" at 5120,1134.99 h75
Mechanical 1:
  the board outline again, w10

## Text inside footprints (layer, text, board x,y; h text height)
H2: Top Overlay "1" at 3995,2270 h40 r270; Top Overlay "2" at 4095,2290 h40 r270; Top Overlay "5" at 3995,1920 h40 r270; Top Overlay "6" at 4095,1920 h40 r270